# Altium PCB VECTOR_routed_no_sc.PcbDoc (part 1 of 3)
Units mil, origin at the board's own origin, x right, y up, seen from the top; angles counter-clockwise.
Board outline 6000 x 4000 mil, 8 copper layers (Top Layer, Signal Layer 1, Signal Layer 2, Signal Layer 3, Signal Layer 4, VCC, Ground, Bottom Layer), stack 66.302 mil thick; 115 components, 252 nets, 1062 pads, 531 vias.
Unrouted connection lines stored in the file: 3.
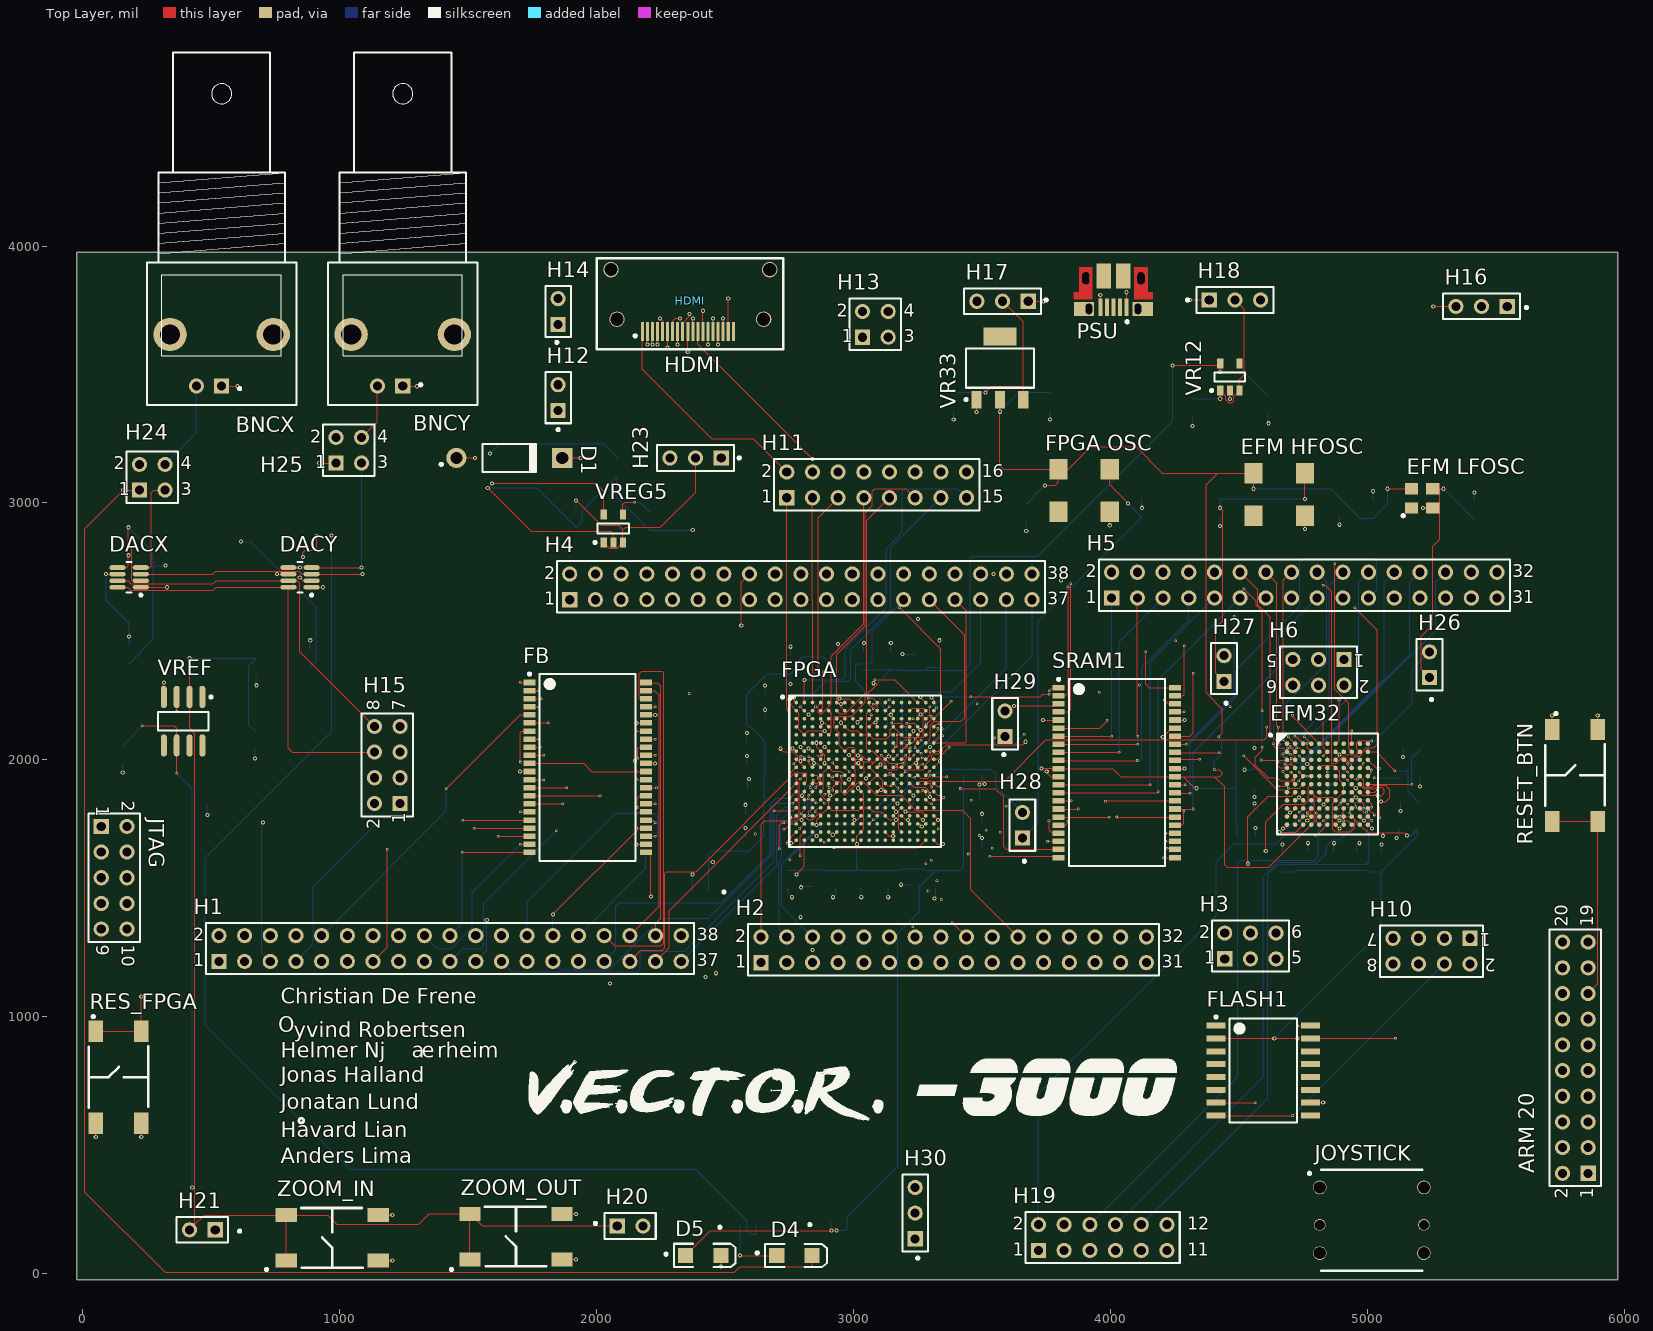
[diagram p0: Top Layer view]
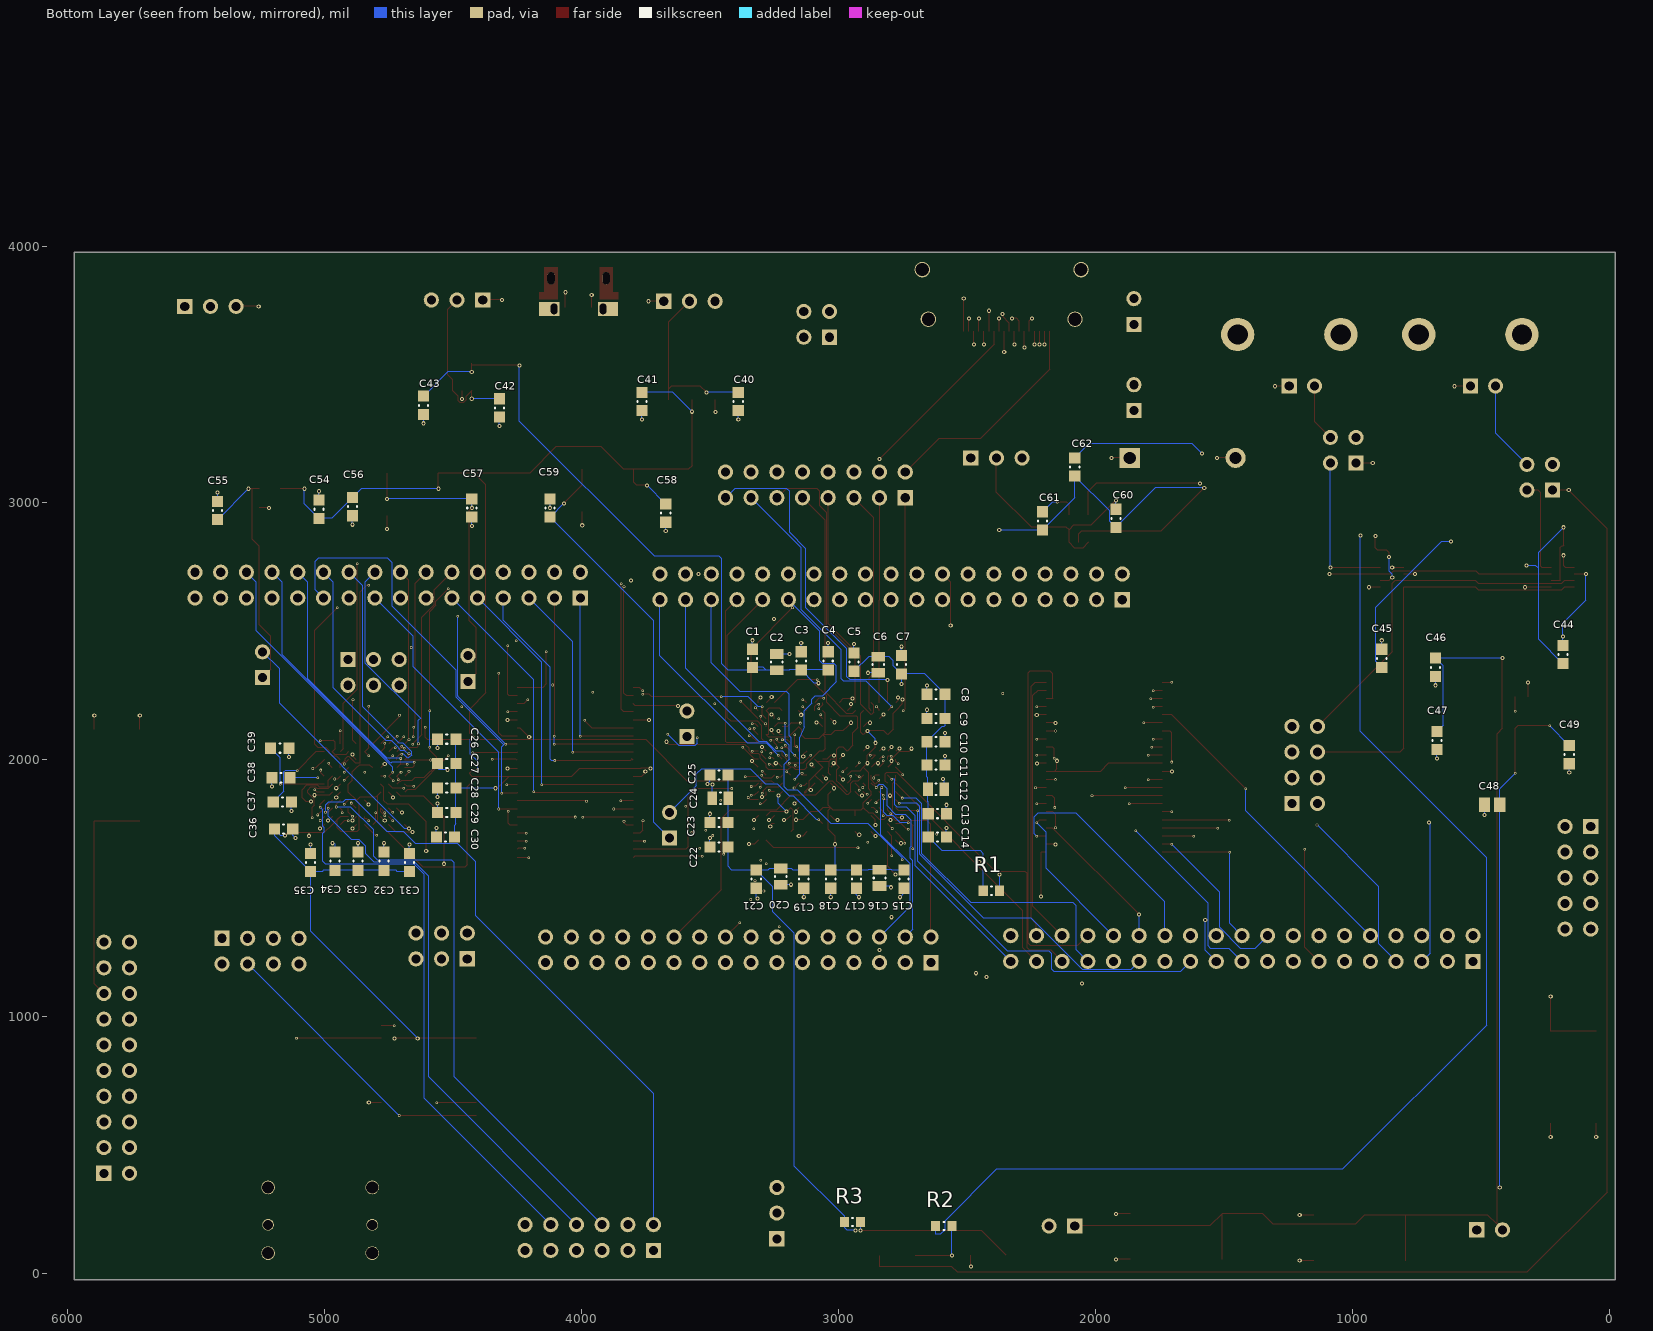
[diagram p1: Bottom Layer view, seen from below]
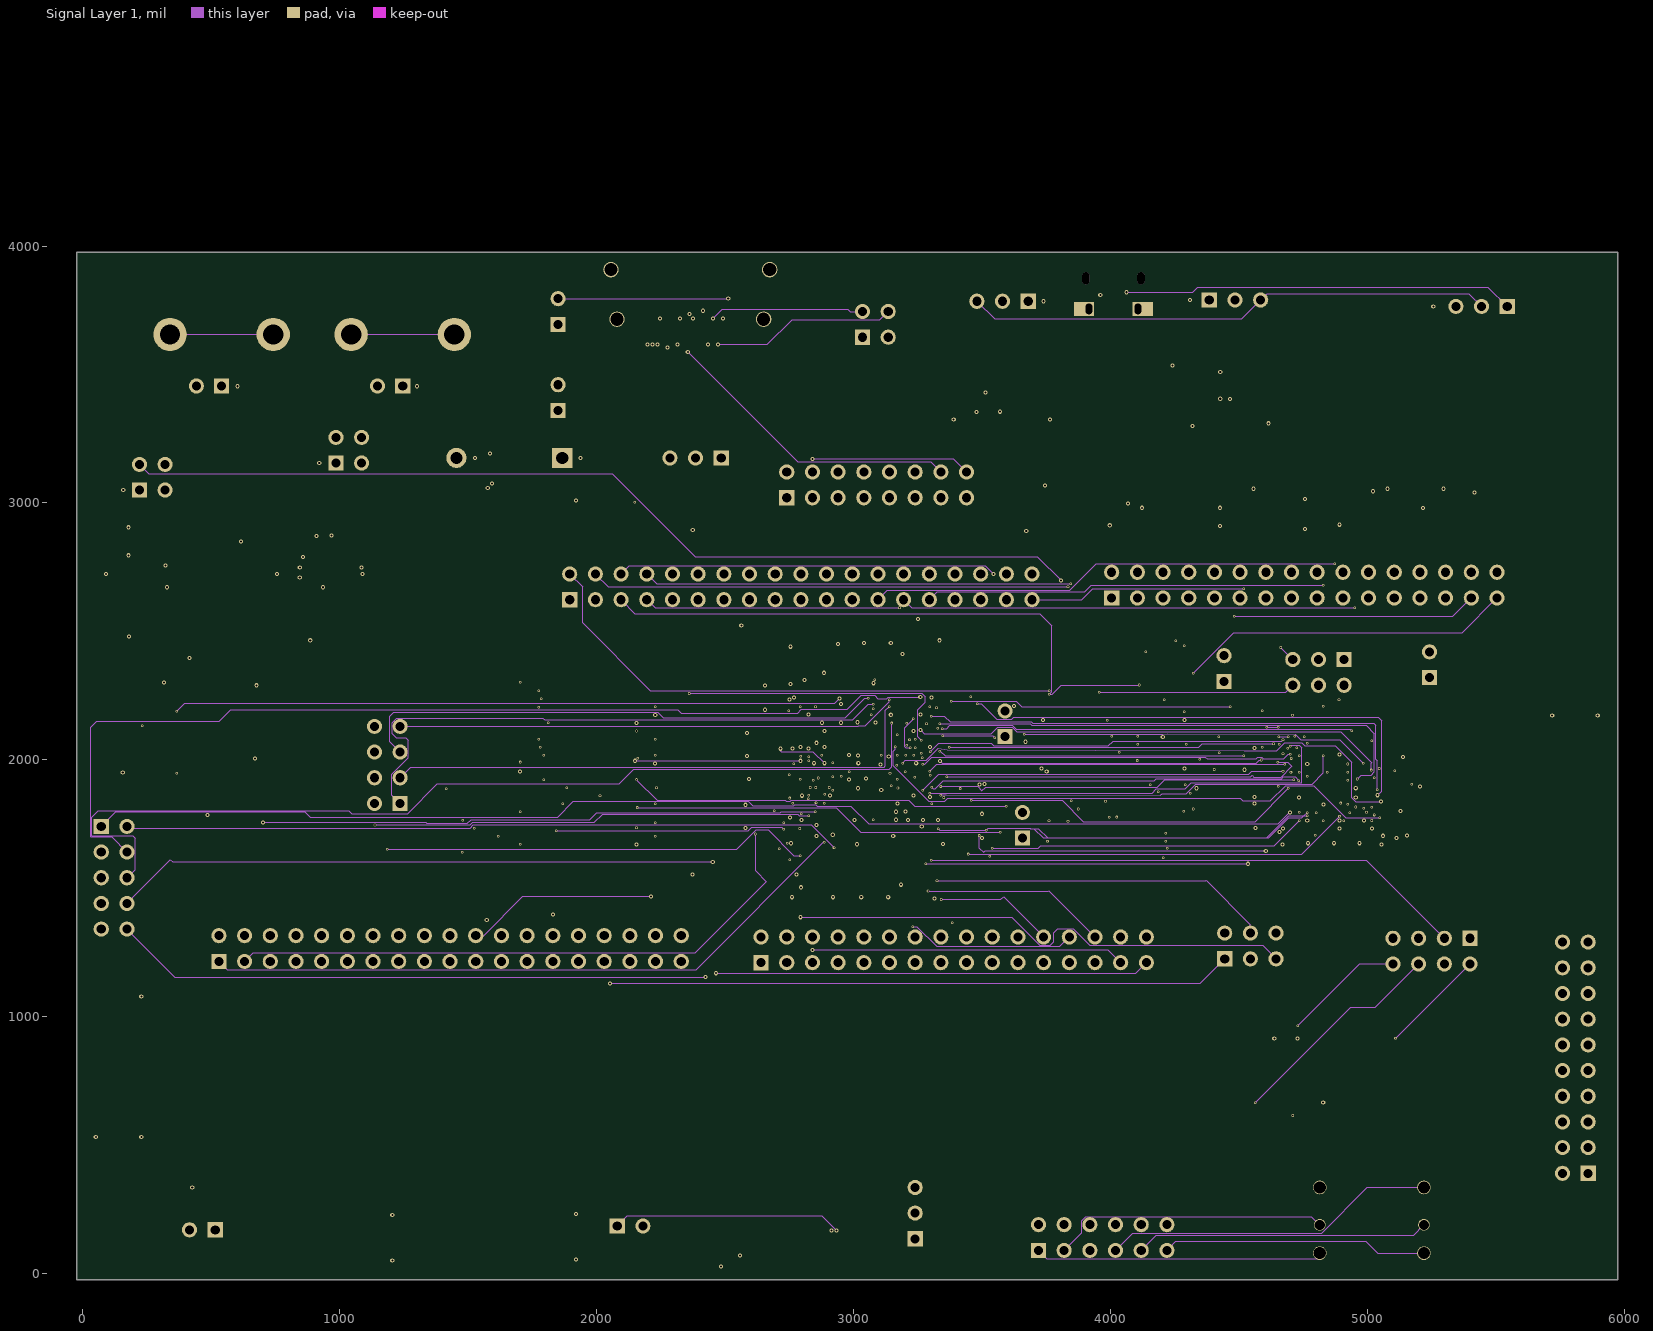
[diagram p2: Signal Layer 1]
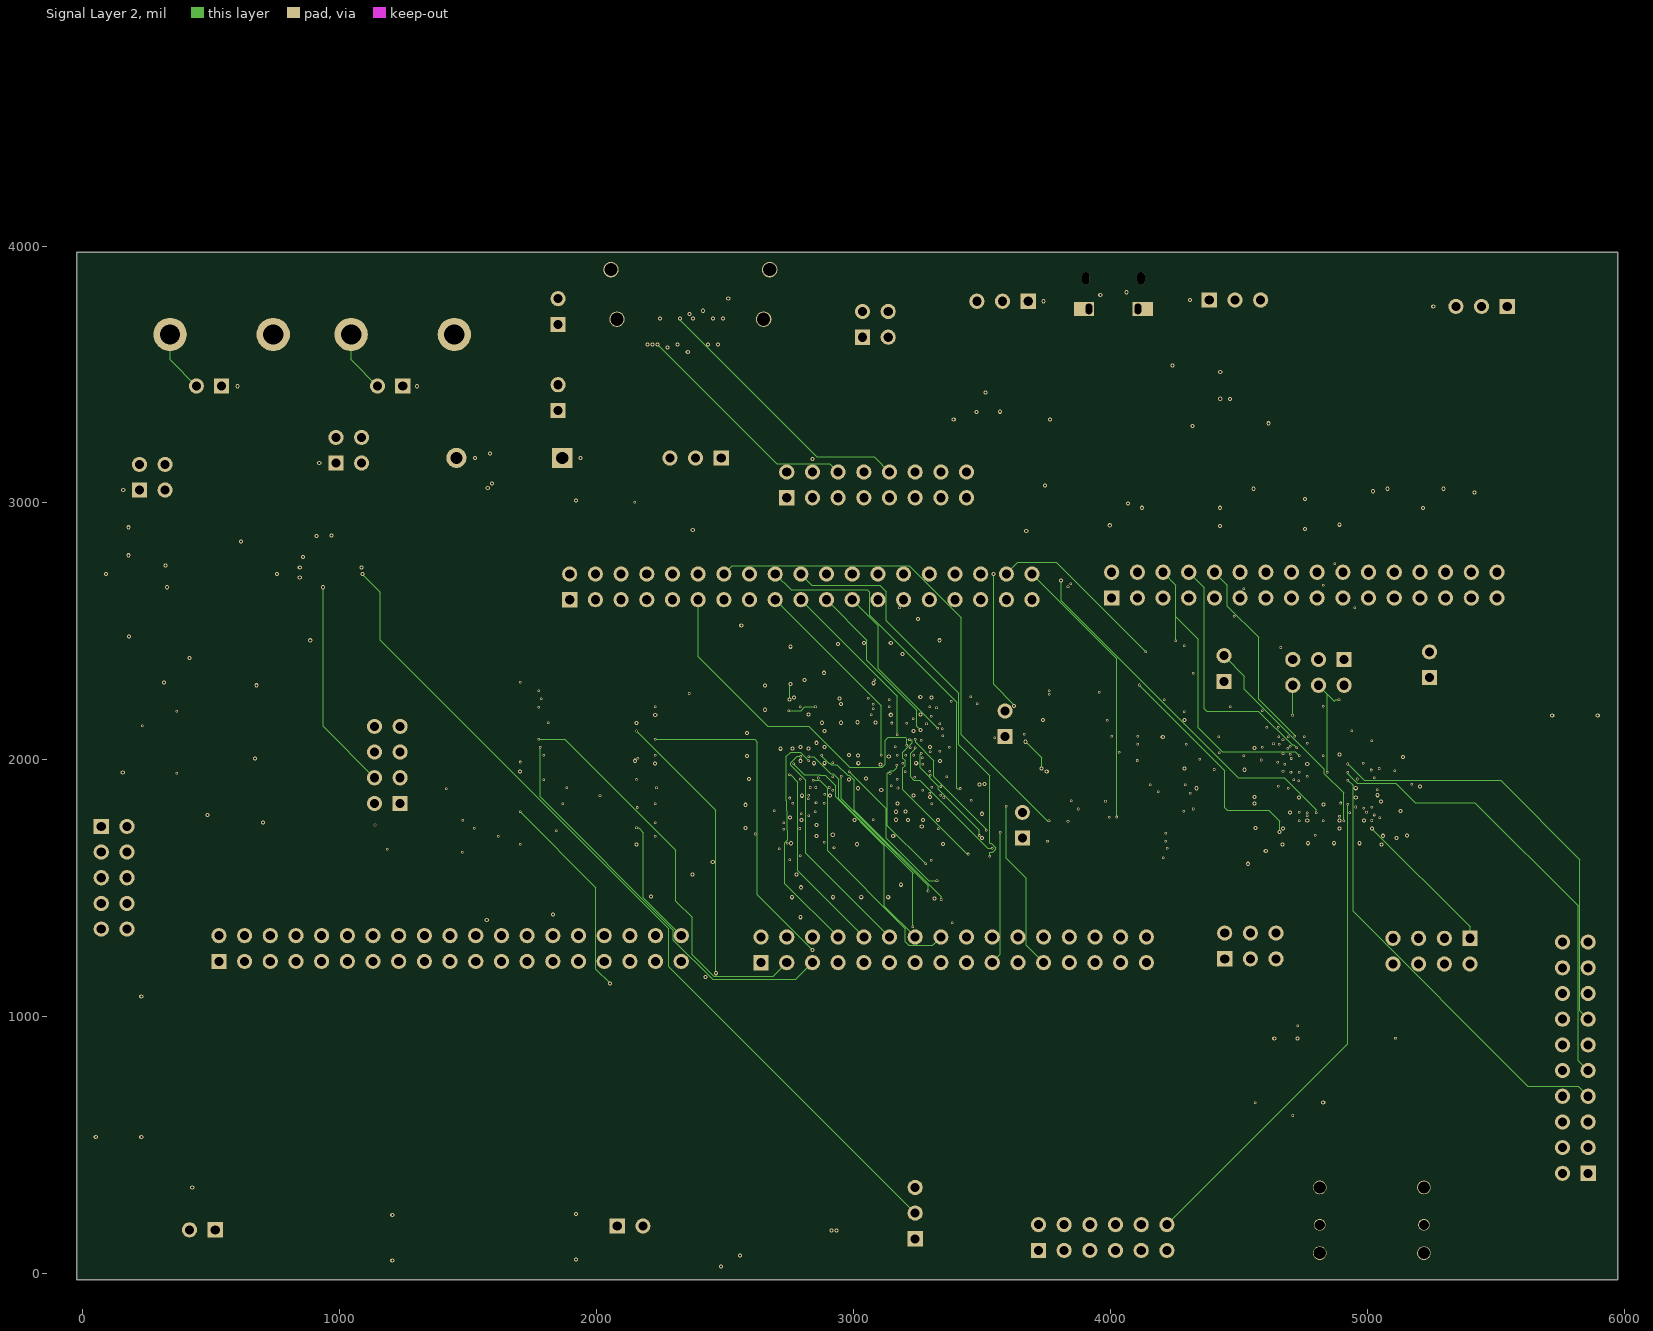
[diagram p3: Signal Layer 2]
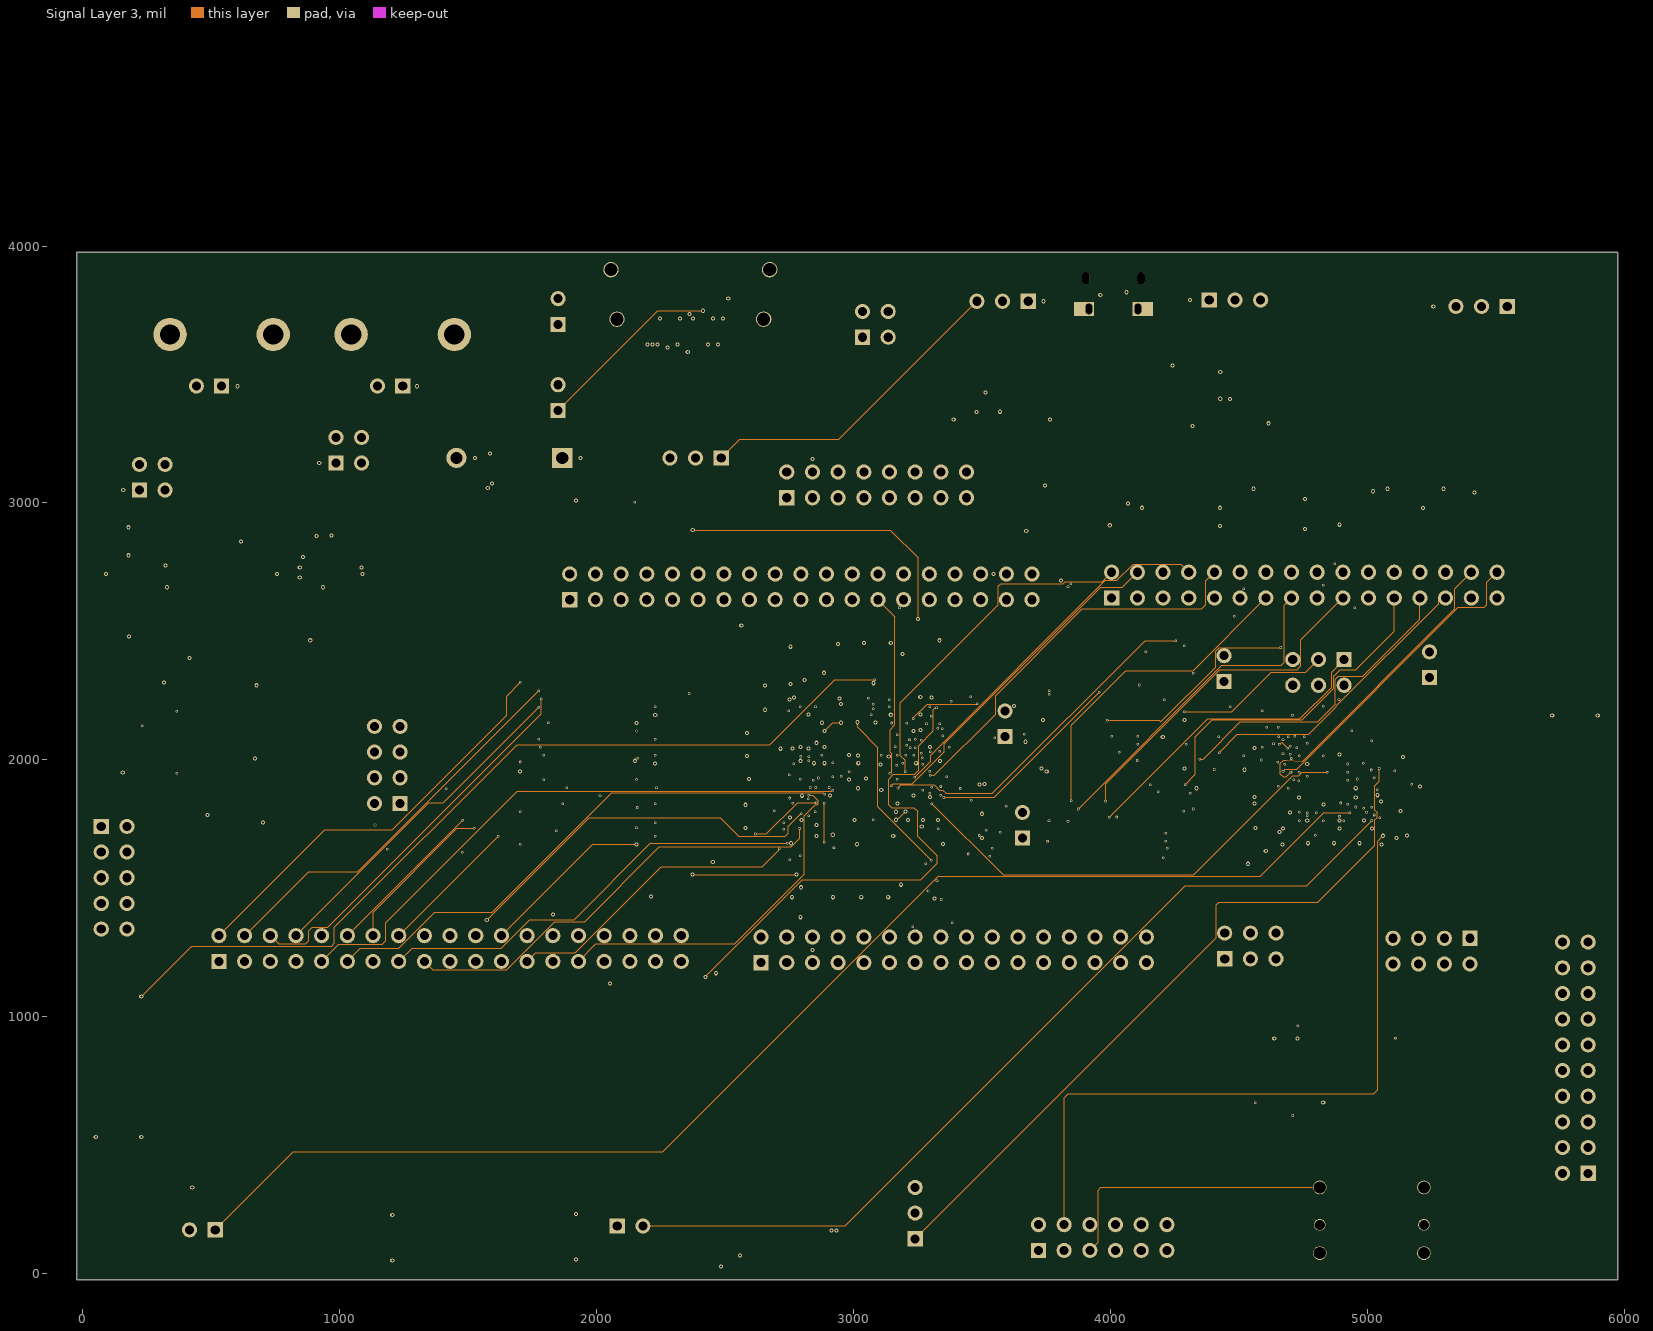
[diagram p4: Signal Layer 3]
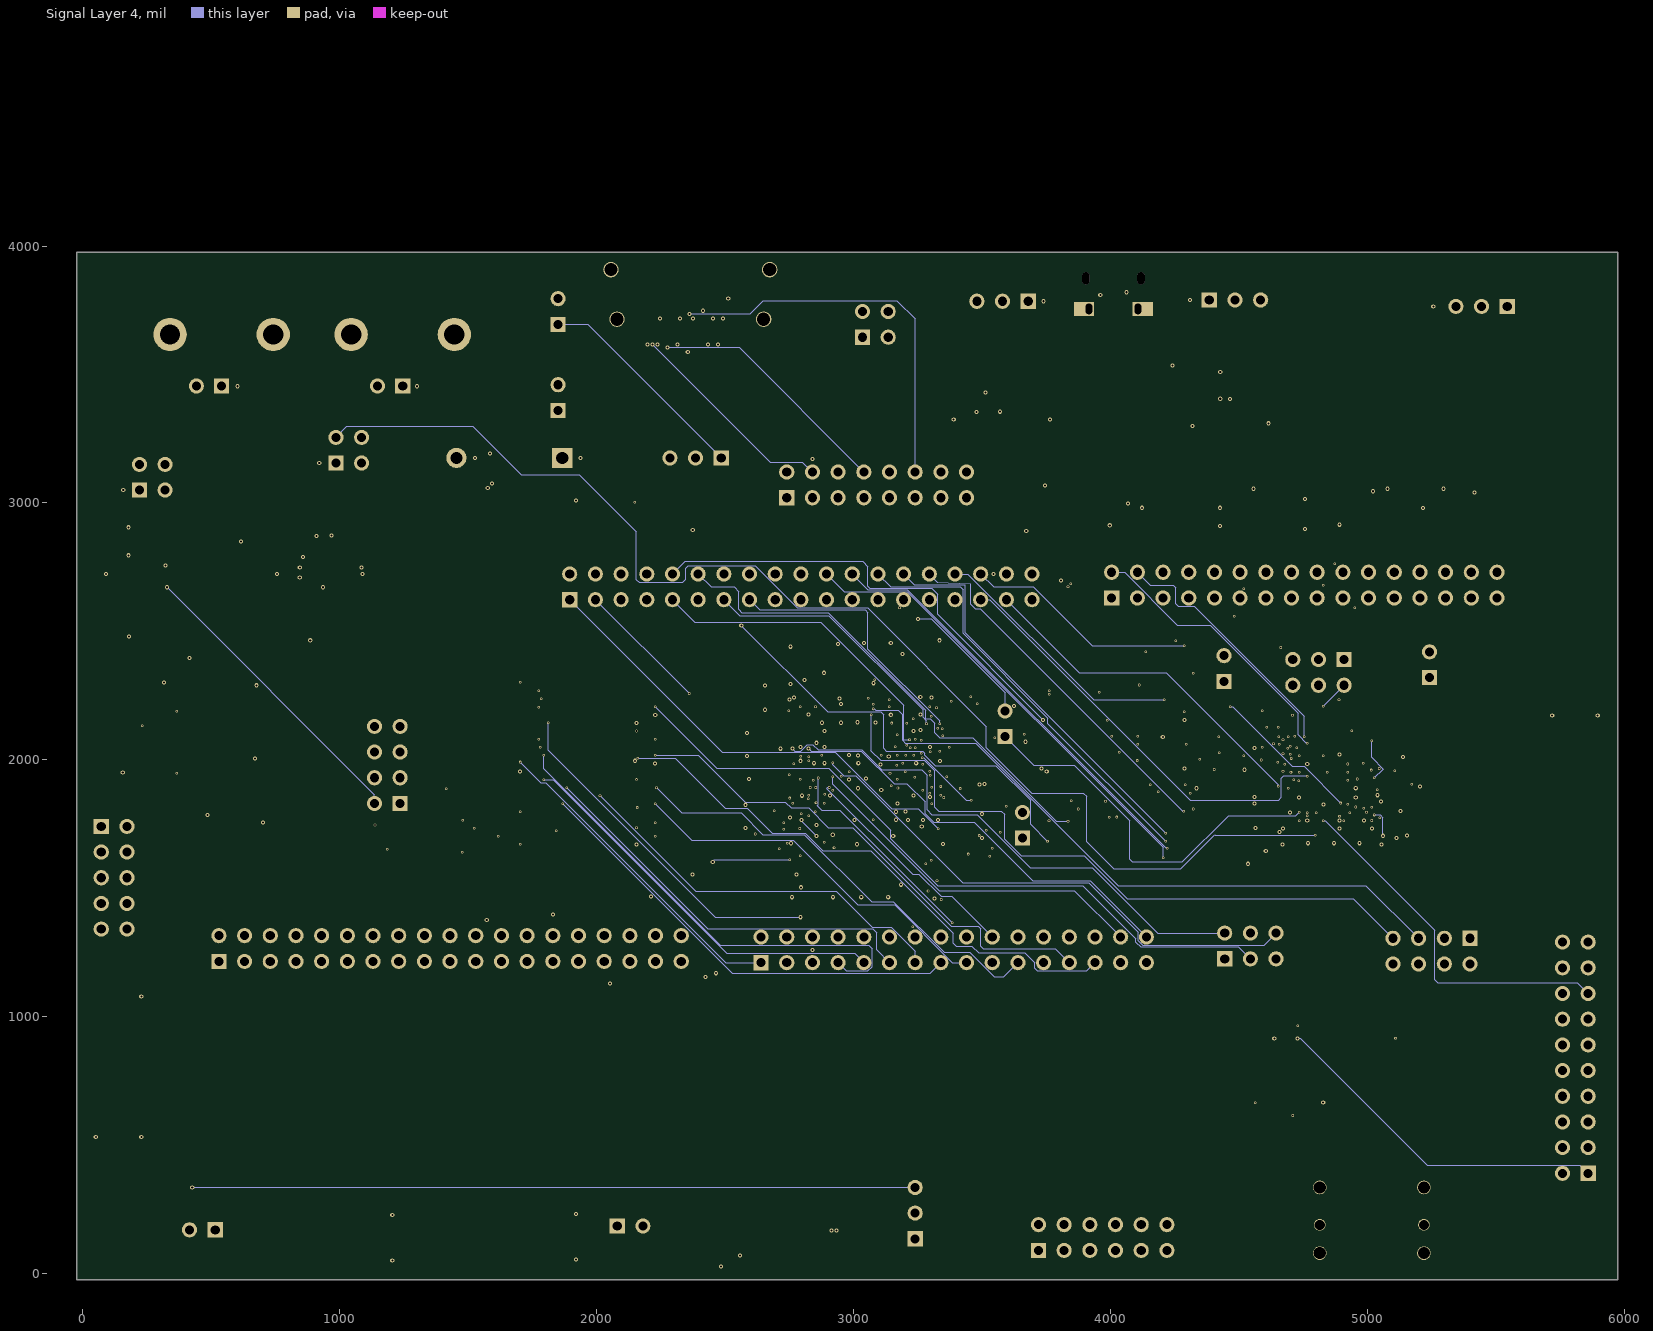
[diagram p5: Signal Layer 4]
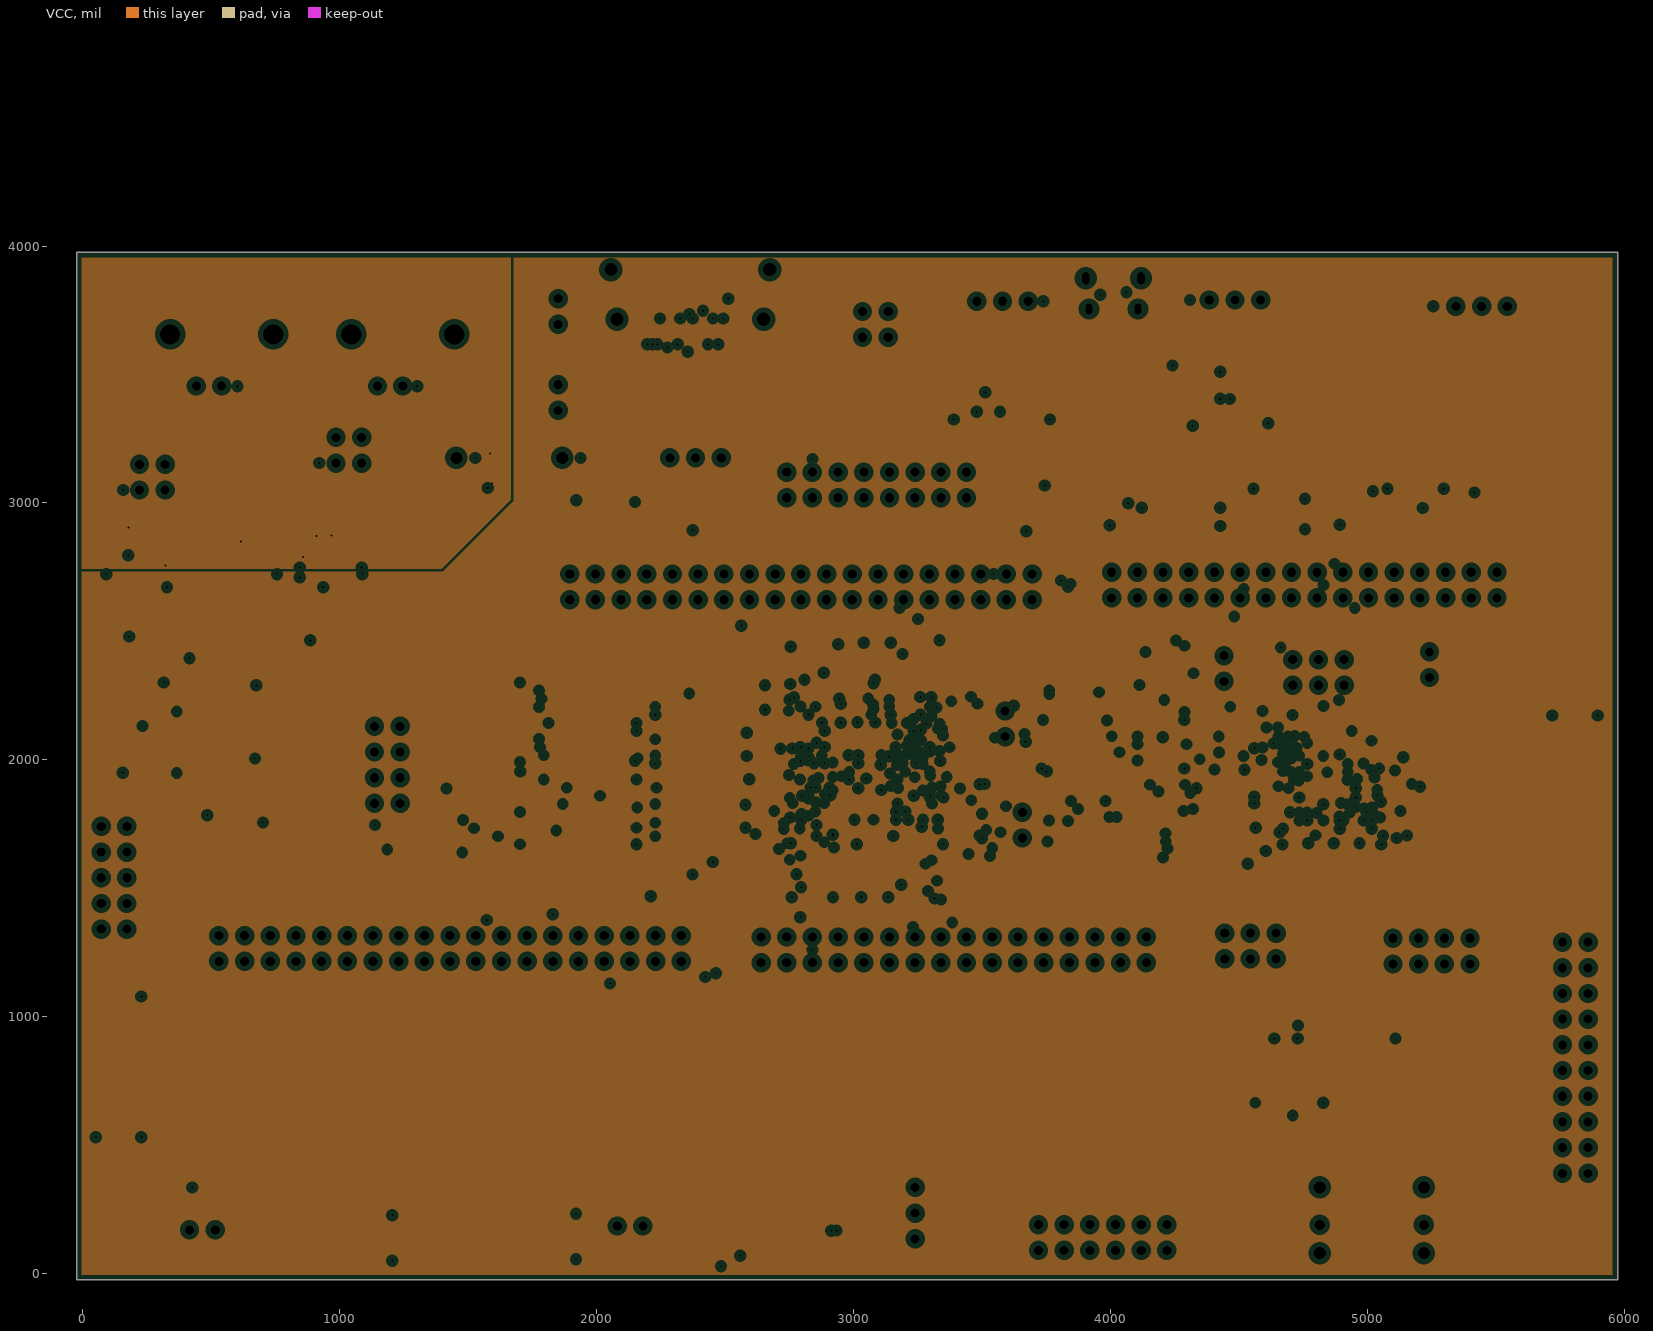
[diagram p6: VCC, clearances drawn from the general rule]
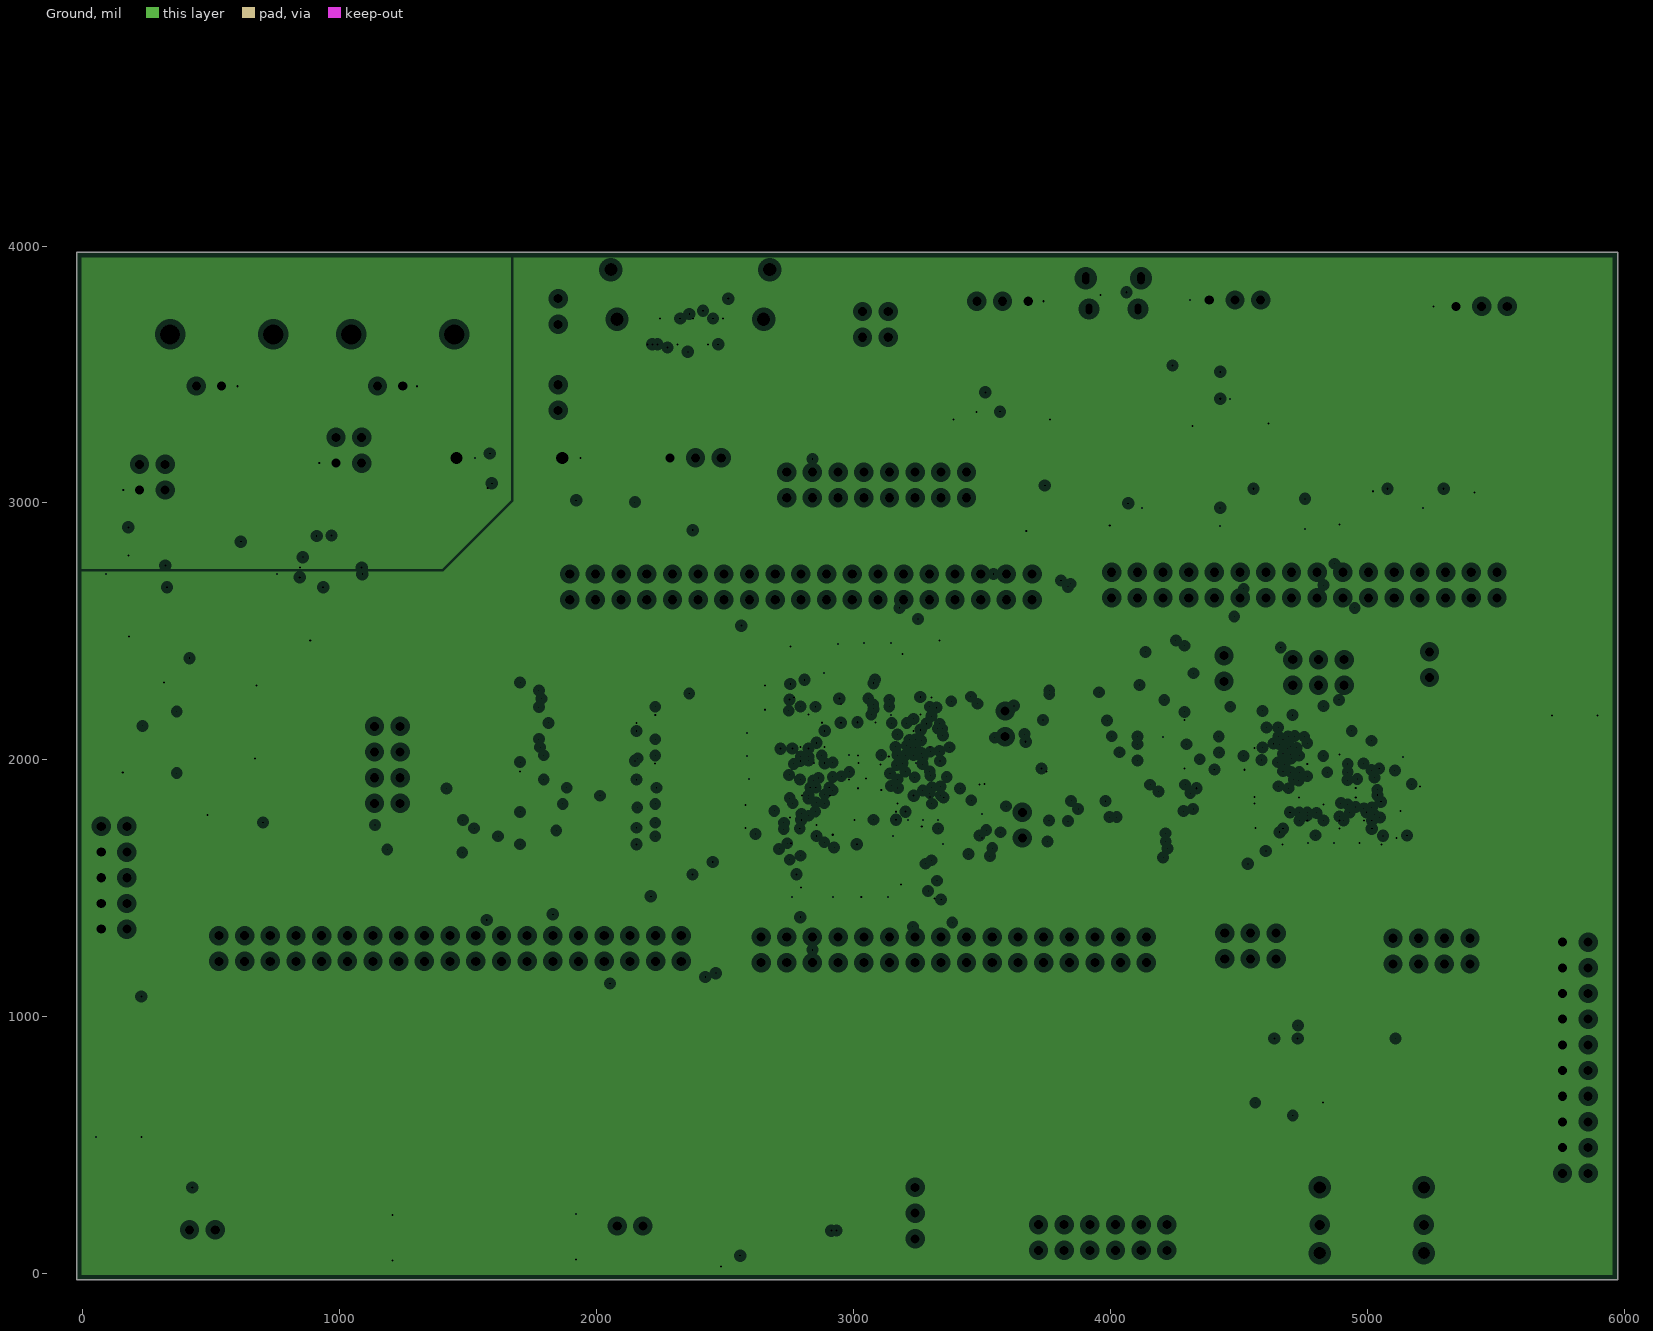
[diagram p7: Ground, clearances drawn from the general rule]

## Layer stack, top to bottom
Top Solder: solder mask 0.4, Solder Resist, Dk 3.5
Top Layer: signal copper 1.4
Dielectric 1: core 10, FR-4, Dk 4.2
Signal Layer 1: signal copper 1.417
Dielectric 5: prepreg 5, Dk 4.2
Signal Layer 2: signal copper 1.417
Dielectric 4: core 10, Dk 4.2
Signal Layer 3: signal copper 1.417
Dielectric 7: prepreg 5, Dk 4.2
Signal Layer 4: signal copper 1.417
Dielectric 8: core 10, Dk 4.2
VCC: plane copper 1.417
Dielectric 3: prepreg 5, Dk 4.2
Ground: plane copper 1.417, net (Multiple Nets)
Dielectric 2: core 10, Dk 4.2
Bottom Layer: signal copper 1.4
Bottom Solder: solder mask 0.4, Solder Resist, Dk 3.5

## Board outline
-25,-25 5975,-25 5975,3975 2980,3975 -25,3975

## Design rules (kind name [scope] priority, off if disabled: settings)
Clearance Clearance_HDMI [InNetClass('HDMI') vs InNetClass('HDMI')] p1: gap=10
Clearance [InNetClass('Not_HDMI') vs InNetClass('Not_HDMI')] p2: gap=3.94
MinimumAnnularRing [All] p1: minimumring=8
MinimumSolderMaskSliver [All] p1: minsoldermaskwidth=3.94
PlaneClearance [All] p1: clearance=20
PlaneConnect [All] p1: planeconnectstyle=Relief reliefexpansion=20 reliefentries=4 reliefconductorwidth=10 reliefairgap=10
PolygonConnect [All] p1: connectstyle=Relief reliefconductorwidth=10 reliefentries=4 polygonreliefangle="90 Angle" airgapwidth=10
RoutingVias [All] p1: holewidth=8 width=16 viastyle="Through Hole" minholewidth=8 minwidth=16 maxholewidth=8 maxwidth=16
SolderMaskExpansion [All] p1: expansion=5
Width Width_Power [InNetClass('Power')] p1: maxlimit=8 minlimit=8 preferedwidth=8
Width [All] p2: maxlimit=4 minlimit=4 preferedwidth=4
27 further rules are at their usual default settings.

## Classes and differential pairs
net class FB.D[0..15]: FB.D0 FB.D1 FB.D2 FB.D3 FB.D4 FB.D5 FB.D6 FB.D7 FB.D8 FB.D9 FB.D10 FB.D11 FB.D12 FB.D13 FB.D14 FB.D15
net class FB.A[0..18]: FB.A0 FB.A1 FB.A2 FB.A3 FB.A4 FB.A5 FB.A6 FB.A7 FB.A8 FB.A9 FB.A10 FB.A11 FB.A12 FB.A13 FB.A14 FB.A15 FB.A16 FB.A17 FB.A18
net class EBI.D[0..15]: EBI.D0 EBI.D1 EBI.D2 EBI.D3 EBI.D4 EBI.D5 EBI.D6 EBI.D7 EBI.D8 EBI.D9 EBI.D10 EBI.D11 EBI.D12 EBI.D13 EBI.D14 EBI.D15
net class EBI.A[0..22]: EBI.A0 EBI.A1 EBI.A2 EBI.A3 EBI.A4 EBI.A5 EBI.A6 EBI.A7 EBI.A8 EBI.A9 EBI.A10 EBI.A11 EBI.A12 EBI.A13 EBI.A14 EBI.A15 EBI.A16 EBI.A17 EBI.A18 EBI.A19 EBI.A20 EBI.A21 EBI.A22
component class Clocks: C54 C55 C56 C57 C58 C59 "EFM HFOSC" "EFM LFOSC" "FPGA OSC" H26 H27 H28
component class DAC: BNCX BNCY C44 C45 C46 C47 C48 C49 D1 DACX DACY H15 H24 H25 H30 VREF
component class "EFM Power": C26 C27 C28 C29 C30 C31 C32 C33 C34 C35 C36 C37 C38
component class EFM: "ARM 20" C39 EFM32 H29 RESET_BTN
component class Flash: FLASH1 H10
component class FPGA_VCC: C1 C2 C3 C4 C5 C6 C7 C8 C9 C10 C11 C12 C13 C14 C15 C16 C17 C18 C19 C20 C21 C22 C23 C24 C25
component class "FPGA Bank 0": FPGA RES_FPGA
component class "FPGA Config": JTAG R1
component class "Frame Buffer": FB H1 H2 H3
component class HDMI: H11 H12 H13 H14 HDMI
component class JoystickButtons: H19 H20 H21 JOYSTICK ZOOM_IN ZOOM_OUT
component class "Power Supply": C40 C41 C42 C43 C60 C61 C62 D4 D5 H16 H17 H18 H23 PSU R2 R3 VR12 VR33 VREG5
component class SRAM: H4 H5 H6 SRAM1

## Components (designator, comment, footprint, x,y, rotation, side; value= is the part's Value field where it differs from the comment)
"ARM 20" "ARM 20 Pin Header" HDR2X10 5860,390 r90 top
BNCX "BNC" "BNC_RA CON" 540,3455 r270 top
BNCY "BNC" "BNC_RA CON" 1245,3455 r270 top
C1 "4.7uF" CAPC0603(1608)100_M 3335,2395 r270 bottom
C2 "100uF" CAPC0805(2012)75_L 3240,2380 r270 bottom
C3 "470nF" CAPC0603(1608)100_M 3145,2385 r270 bottom
C4 "470nF" CAPC0603(1608)100_M 3040,2385 r270 bottom
C5 "4.7uF" CAPC0603(1608)100_M 2940,2380 r270 bottom
C6 "100uF" CAPC0805(2012)75_L 2845,2370 r90 bottom
C7 "470nF" CAPC0603(1608)100_M 2755,2370 r270 bottom
C8 "470nF" CAPC0603(1608)100_M 2620,2255 r180 bottom
C9 "470nF" CAPC0603(1608)100_M 2620,2160 r180 bottom
C10 "470nF" CAPC0603(1608)100_M 2620,2070 r0 bottom
C11 "470nF" CAPC0603(1608)100_M 2620,1980 r0 bottom
C12 "100uF" CAPC0805(2012)75_L 2620,1885 r0 bottom
C13 "4.7uF" CAPC0603(1608)100_M 2615,1790 r0 bottom
C14 "470nF" CAPC0603(1608)100_M 2615,1700 r0 bottom
C15 "470nF" CAPC0603(1608)100_M 2745,1535 r90 bottom
C16 "100uF" CAPC0805(2012)75_L 2840,1540 r90 bottom
C17 "4.7uF" CAPC0603(1608)100_M 2930,1535 r90 bottom
C18 "470nF" CAPC0603(1608)100_M 3030,1535 r90 bottom
C19 "470nF" CAPC0603(1608)100_M 3135,1535 r90 bottom
C20 "100uF" CAPC0805(2012)75_L 3225,1545 r90 bottom
C21 "4.7uF" CAPC0603(1608)100_M 3320,1535 r90 bottom
C22 "470nF" CAPC0603(1608)100_M 3465,1660 r180 bottom
C23 "470nF" CAPC0603(1608)100_M 3465,1755 r180 bottom
C24 "100uF" CAPC0805(2012)75_L 3460,1850 r180 bottom
C25 "4.7uF" CAPC0603(1608)100_M 3465,1940 r180 bottom
C26 "100nF" CAPC0603(1608)100_M 4525,2080 r180 bottom
C27 "100nF" CAPC0603(1608)100_M 4525,1985 r180 bottom
C28 "100nF" CAPC0603(1608)100_M 4525,1890 r180 bottom
C29 "100nF" CAPC0603(1608)100_M 4525,1795 r180 bottom
C30 "100nF" CAPC0603(1608)100_M 4530,1700 r180 bottom
C31 "100nF" CAPC0603(1608)100_M 4670,1600 r270 bottom
C32 "100nF" CAPC0603(1608)100_M 4770,1605 r90 bottom
C33 "10uF" CAPC0603(1608)100_M 4870,1605 r90 bottom
C34 "100nF" CAPC0603(1608)100_M 4960,1605 r90 bottom
C35 "100nF" CAPC0603(1608)100_M 5055,1600 r90 bottom
C36 "100nF" CAPC0603(1608)100_M 5160,1730 r180 bottom
C37 "1uF" CAPC0603(1608)100_M 5165,1835 r180 bottom
C38 "4.7uF" CAPC0603(1608)100_M 5170,1930 r180 bottom
C39 "1uF" CAPC0603(1608)100_M 5175,2045 r180 bottom
C40 "1uF" CAPC0603(1608)100_M 3390,3395 r90 bottom
C41 "1uF" CAPC0603(1608)100_M 3765,3395 r90 bottom
C42 "1uF" CAPC0603(1608)100_M 4320,3370 r90 bottom
C43 "1uF" CAPC0603(1608)100_M 4615,3380 r90 bottom
C44 "1uF" CAPC0603(1608)100_M 180,2410 r90 bottom
C45 "1uF" CAPC0603(1608)100_M 885,2395 r90 bottom
C46 "10uF" CAPC0603(1608)100_M 675,2360 r90 bottom
C47 "100nF" CAPC0603(1608)100_M 670,2075 r90 bottom
C48 "1uF" C0805 455,1825 r0 bottom
C49 "100nF" CAPC0603(1608)100_M 155,2020 r90 bottom
C54 "10nF" CAPC0603(1608)100_M 5022.42,2975.16 r270 bottom
C55 "15pF" CAPC0603(1608)100_M 5417.42,2970.16 r270 bottom
C56 "10nF" CAPC0603(1608)100_M 4892.42,2985.16 r90 bottom
C57 "15pF" CAPC0603(1608)100_M 4427.42,2980.16 r90 bottom
C58 "10nF" CAPC0603(1608)100_M 3672.42,2960.16 r90 bottom
C59 "15pF" CAPC0603(1608)100_M 4122.42,2980.16 r270 bottom
C60 "1uF" CAPC0603(1608)100_M 1920,2940 r90 bottom
C61 "4.7uF" CAPC0603(1608)100_M 2205,2930 r90 bottom
C62 "4.7uF" CAPC0603(1608)100_M 2080,3140 r90 bottom
D1 "Diode 1N4001" DO-41 1660,3175 r0 top
D4 "LED2" 3.2X1.6X1.1 2769.88,69.68 r0 top
D5 "LED2" 3.2X1.6X1.1 2415.16,70.47 r0 top
DACX "AD5061BRJZ-1500RL7" RJ-8_N 180,2710 r180 top
DACY "AD5061BRJZ-1500RL7" RJ-8_N 845,2710 r180 top
EFM32 "EFM32GG990F1024-BGA112" ENMR-BGA112 4845,1905 r0 top
"EFM HFOSC" "FXO-HC736R-48" FPGA-OSC 4522.42,2910.16 r90 top
"EFM LFOSC" "F32K-327" LFOSC-32 5172.42,2980.16 r90 top
FB "CY7C1051DV33-10ZSXI" TSOP-44-SRAM 1965,1970 r0 top
FLASH1 "S25FL129P0XMFI001" SOIC-16-FLASH 4595,790 r0 top
FPGA "XC6SLX45-2CSG324I" CSG324 3045,1955 r0 top
"FPGA OSC" "FXO-HC736R-100" FPGA-OSC 3762.42,2925.16 r90 top
H1 "FB_ADDRESS_HEADER" HDR2X19 529.33,1215.16 r0 top
H2 "FB_DATA_HEADER" HDR2X16 2640,1210 r0 top
H3 "FB_CONTROL_HEADER" HDR2X3 4445,1225 r0 top
H4 "SRAM1_ADDRESS_HEADER" HDR2X19 1895.08,2623.03 r0 top
H5 "SRAM1_DATA_HEADER" HDR2X16 4005,2630 r0 top
H6 "SRAM1_CONTROL_HEADER" HDR2X3 4910,2390 r180 top
H10 "FLASH_HEADER" HDR2X4 5400,1305 r180 top
H11 "HDMI_HEADER" HDR2X8 2740,3020 r0 top
H12 "CEC_HEADER" HDR1X2 1850,3360 r90 top
H13 "DDC_HEADER" HDR2X2 3035,3645 r0 top
H14 "POWER_HEADER" HDR1X2 1850,3695 r90 top
H15 "DAC_HEADER" HDR2X4 1235,1830 r90 top
H16 "5V_HEADER" HDR1X3 5545,3765 r180 top
H17 "3.3V_HEADER" HDR1X3 3680,3785 r180 top
H18 "1.2V_HEADER" HDR1X3 4385,3790 r0 top
H19 "JOYSTICK_HEADER" HDR2X6 3720,90 r0 top
H20 "ZOOM_OUT_HEADER" HDR1X2 2080,185 r0 top
H21 "ZOOM_IN_HEADER" HDR1X2 515,170 r180 top
H23 "5V_DAC_HEADER" HDR1X3 2485,3175 r180 top
H24 "Header 2X2" HDR2X2 220,3050 r0 top
H25 "Header 2X2" HDR2X2 985,3155 r0 top
H26 "Header 2" HDR1X2 5242.42,2320.16 r90 top
H27 "Header 2" HDR1X2 4442.42,2305.16 r90 top
H28 "Header 2" HDR1X2 3657.42,1695.16 r90 top
H29 "Header 2" HDR1X2 3590,2090 r90 top
H30 "Header 3" HDR1X3 3240,135 r90 top
HDMI "HDMI_connector" HDMI-type-A 2650,3715 r180 top
JOYSTICK "SKQUCAA010" 5-WAY-JOYSTICK 4815,335 r0 top
JTAG "Header 5X2" HDR2X5 71.26,1740.55 r270 top
PSU "MICRO-USB_CONNECTOR" MICRO-USB 4011.81,3762.2 r180 top
R1 "4.7kOhm" RESC0603(1608)_N 2405,1490 r0 bottom
R2 "39 Ohm" RESC0603(1608)_N 2590,185 r0 bottom
R3 "18 Ohm" RESC0603(1608)_N 2945,200 r0 bottom
RES_FPGA "FSM2JSMA" Button 50,585 r0 top
RESET_BTN "FSM2JSMA" Button 5720,1760 r0 top
SRAM1 "CY7C1051DV33-10ZSXI" TSOP-44-SRAM 4025,1950 r0 top
VR12 "ADP170AUJZ-1.2-r7" VREG-1.2 4465,3490 r90 top
VR33 "ADP3339AKCZ-3.3-r7" VREG-3.3 3570,3525 r90 top
VREF "REF195GSZ-REEL7" ADI-R-8_N 390,2150 r270 top
VREG5 "LP2992AIM5-5.0/NOPB" VREG-5 2065,2900 r90 top
ZOOM_IN "FSM2JSMA" Button 1150,50 r90 top
ZOOM_OUT "FSM2JSMA" Button 1865,55 r90 top

## Footprints (in the part's own frame and the unit in brackets; to place one, negate y for a bottom-side part, rotate by r counter-clockwise, add the part's x,y. Pads: shape width x height; smd on the part's side, far side on the other; paste and mask are expansions set on the pad)
3.2X1.6X1.1 [mm] "SMT LED; 2 Flat Leads"
  rect 1.5x1.5 smd: 1(-1.75,0) 2(1.75,0)
  silkscreen extent -2.9,-1.15 3.2,1.15
5-WAY-JOYSTICK [mm]
  oval 1.34x1.35 hole 1.2: 1(0,0) 3(0,-6.5) 4(10.3,-6.5) 6(10.3,0)
  round 1.15 hole 1: 2(0,-3.7) 5(10.3,-3.7)
  silkscreen extent 0.15,-8.25 10.15,1.75
ADI-R-8_N [mm] "SOIC, 8-Leads, Body 4.9x3.9mm, Pitch 1.27mm, IPC Medium Density"
  oval 2.2x0.6 smd: 1(-2.4,1.905) 2(-2.4,0.635) 3(-2.4,-0.635) 4(-2.4,-1.905) 5(2.4,-1.905) 6(2.4,-0.635) 7(2.4,0.635) 8(2.4,1.905)
  silkscreen extent -2.52,-2.5 0.9,2.88, body extent -2,-2.5 2,2.5, height 1.75
"BNC_RA CON" [mm] "Connector; BNC Elbow"
  rect 1.5x1.5 hole 0.9: 1(0,0)
  round 3.3 hole 2: 2(-5.1,5.1) 2(-5.1,-5.1)
  round 1.5 hole 0.9: 2(0,-2.5)
  silkscreen extent -33,-7.4 1.9,7.4
Button [mm] "copied from 256 SoG"
  rect 1.4x2.1 smd: 1(0,9.1) 2(0,0) 3(4.5,9.1) 4(4.5,0)
  silkscreen extent -0.7,1.55 5.21,7.62
C0805 [mm] "Chip Capacitor, Body 2.0x1.3mm, IPC High Density"
  rect 1.1x1.4 smd: 1(-0.75,0) 2(0.75,0)
  body extent -1.1,-0.72 1.1,0.72, height 1.4
CAPC0603(1608)100_M [mm] "Chip Capacitor, Body 1.6x0.8mm, Height 1.0mm, IPC Low Density"
  rect 1.1x1.1 smd: 1(-0.9,0) 2(0.9,0)
  silkscreen extent -0.05,-0.45 0.05,0.45, body extent -0.87,-0.47 0.88,0.48, height 1
CAPC0805(2012)75_L [mm] "Chip Capacitor, Body 2.0x1.2mm, Height 0.75mm, IPC High Density"
  rect 0.95x1.35 smd: 1(-0.8,0) 2(0.8,0)
  silkscreen extent -0.05,-0.58 0.05,0.58, body extent -1.1,-0.72 1.1,0.72, height 0.75
CSG324 [mm] "BGA, 324-Leads, Body 15x15mm, Pitch 0.8mm"
  round 0.36 smd: A1(-6.8,6.8) A2(-6,6.8) A3(-5.2,6.8) A4(-4.4,6.8) A5(-3.6,6.8) A6(-2.8,6.8) A7(-2,6.8) A8(-1.2,6.8) A9(-0.4,6.8) A10(0.4,6.8) A11(1.2,6.8) A12(2,6.8) A13(2.8,6.8) A14(3.6,6.8) A15(4.4,6.8) A16(5.2,6.8) A17(6,6.8) A18(6.8,6.8) B1(-6.8,6) B2(-6,6) B3(-5.2,6) B4(-4.4,6) B5(-3.6,6) B6(-2.8,6) B7(-2,6) B8(-1.2,6) B9(-0.4,6) B10(0.4,6) B11(1.2,6) B12(2,6) B13(2.8,6) B14(3.6,6) B15(4.4,6) B16(5.2,6) B17(6,6) B18(6.8,6) C1(-6.8,5.2) C2(-6,5.2) C3(-5.2,5.2) C4(-4.4,5.2) C5(-3.6,5.2) C6(-2.8,5.2) C7(-2,5.2) C8(-1.2,5.2) C9(-0.4,5.2) C10(0.4,5.2) C11(1.2,5.2) C12(2,5.2) C13(2.8,5.2) C14(3.6,5.2) C15(4.4,5.2) C16(5.2,5.2) C17(6,5.2) C18(6.8,5.2) D1(-6.8,4.4) D2(-6,4.4) D3(-5.2,4.4) D4(-4.4,4.4) D5(-3.6,4.4) D6(-2.8,4.4) D7(-2,4.4) D8(-1.2,4.4) D9(-0.4,4.4) D10(0.4,4.4) D11(1.2,4.4) D12(2,4.4) D13(2.8,4.4) D14(3.6,4.4) D15(4.4,4.4) D16(5.2,4.4) D17(6,4.4) D18(6.8,4.4) E1(-6.8,3.6) E2(-6,3.6) E3(-5.2,3.6) E4(-4.4,3.6) E5(-3.6,3.6) E6(-2.8,3.6) E7(-2,3.6) E8(-1.2,3.6) E9(-0.4,3.6) E10(0.4,3.6) E11(1.2,3.6) E12(2,3.6) E13(2.8,3.6) E14(3.6,3.6) E15(4.4,3.6) E16(5.2,3.6) E17(6,3.6) E18(6.8,3.6) F1(-6.8,2.8) F2(-6,2.8) F3(-5.2,2.8) F4(-4.4,2.8) F5(-3.6,2.8) F6(-2.8,2.8) F7(-2,2.8) F8(-1.2,2.8) F9(-0.4,2.8) F10(0.4,2.8) F11(1.2,2.8) F12(2,2.8) F13(2.8,2.8) F14(3.6,2.8) F15(4.4,2.8) F16(5.2,2.8) F17(6,2.8) F18(6.8,2.8) G1(-6.8,2) G2(-6,2) G3(-5.2,2) G4(-4.4,2) G5(-3.6,2) G6(-2.8,2) G7(-2,2) G8(-1.2,2) G9(-0.4,2) G10(0.4,2) G11(1.2,2) G12(2,2) G13(2.8,2) G14(3.6,2) G15(4.4,2) G16(5.2,2) G17(6,2) G18(6.8,2) H1(-6.8,1.2) H2(-6,1.2) H3(-5.2,1.2) H4(-4.4,1.2) H5(-3.6,1.2) H6(-2.8,1.2) H7(-2,1.2) H8(-1.2,1.2) H9(-0.4,1.2) H10(0.4,1.2) H11(1.2,1.2) H12(2,1.2) H13(2.8,1.2) H14(3.6,1.2) H15(4.4,1.2) H16(5.2,1.2) H17(6,1.2) H18(6.8,1.2) J1(-6.8,0.4) J2(-6,0.4) J3(-5.2,0.4) J4(-4.4,0.4) J5(-3.6,0.4) J6(-2.8,0.4) J7(-2,0.4) J8(-1.2,0.4) J9(-0.4,0.4) J10(0.4,0.4) J11(1.2,0.4) J12(2,0.4) J13(2.8,0.4) J14(3.6,0.4) J15(4.4,0.4) J16(5.2,0.4) J17(6,0.4) J18(6.8,0.4) K1(-6.8,-0.4) K2(-6,-0.4) K3(-5.2,-0.4) K4(-4.4,-0.4) K5(-3.6,-0.4) K6(-2.8,-0.4) K7(-2,-0.4) K8(-1.2,-0.4) K9(-0.4,-0.4) K10(0.4,-0.4) K11(1.2,-0.4) K12(2,-0.4) K13(2.8,-0.4) K14(3.6,-0.4) K15(4.4,-0.4) K16(5.2,-0.4) K17(6,-0.4) K18(6.8,-0.4) L1(-6.8,-1.2) L2(-6,-1.2) L3(-5.2,-1.2) L4(-4.4,-1.2) L5(-3.6,-1.2) L6(-2.8,-1.2) L7(-2,-1.2) L8(-1.2,-1.2) L9(-0.4,-1.2) L10(0.4,-1.2) L11(1.2,-1.2) L12(2,-1.2) L13(2.8,-1.2) L14(3.6,-1.2) L15(4.4,-1.2) L16(5.2,-1.2) L17(6,-1.2) L18(6.8,-1.2) M1(-6.8,-2) M2(-6,-2) M3(-5.2,-2) M4(-4.4,-2) M5(-3.6,-2) M6(-2.8,-2) M7(-2,-2) M8(-1.2,-2) M9(-0.4,-2) M10(0.4,-2) M11(1.2,-2) M12(2,-2) M13(2.8,-2) M14(3.6,-2) M15(4.4,-2) M16(5.2,-2) M17(6,-2) M18(6.8,-2) N1(-6.8,-2.8) N2(-6,-2.8) N3(-5.2,-2.8) N4(-4.4,-2.8) N5(-3.6,-2.8) N6(-2.8,-2.8) N7(-2,-2.8) N8(-1.2,-2.8) N9(-0.4,-2.8) N10(0.4,-2.8) N11(1.2,-2.8) N12(2,-2.8) N13(2.8,-2.8) N14(3.6,-2.8) N15(4.4,-2.8) N16(5.2,-2.8) N17(6,-2.8) N18(6.8,-2.8) P1(-6.8,-3.6) P2(-6,-3.6) P3(-5.2,-3.6) P4(-4.4,-3.6) P5(-3.6,-3.6) P6(-2.8,-3.6) P7(-2,-3.6) P8(-1.2,-3.6) P9(-0.4,-3.6) P10(0.4,-3.6) P11(1.2,-3.6) P12(2,-3.6) P13(2.8,-3.6) P14(3.6,-3.6) P15(4.4,-3.6) P16(5.2,-3.6) P17(6,-3.6) P18(6.8,-3.6) R1(-6.8,-4.4) R2(-6,-4.4) R3(-5.2,-4.4) R4(-4.4,-4.4) R5(-3.6,-4.4) R6(-2.8,-4.4) R7(-2,-4.4) R8(-1.2,-4.4) R9(-0.4,-4.4) R10(0.4,-4.4) R11(1.2,-4.4) R12(2,-4.4) R13(2.8,-4.4) R14(3.6,-4.4) R15(4.4,-4.4) R16(5.2,-4.4) R17(6,-4.4) R18(6.8,-4.4) T1(-6.8,-5.2) T2(-6,-5.2) T3(-5.2,-5.2) T4(-4.4,-5.2) T5(-3.6,-5.2) T6(-2.8,-5.2) T7(-2,-5.2) T8(-1.2,-5.2) T9(-0.4,-5.2) T10(0.4,-5.2) T11(1.2,-5.2) T12(2,-5.2) T13(2.8,-5.2) T14(3.6,-5.2) T15(4.4,-5.2) T16(5.2,-5.2) T17(6,-5.2) T18(6.8,-5.2) U1(-6.8,-6) U2(-6,-6) U3(-5.2,-6) U4(-4.4,-6) U5(-3.6,-6) U6(-2.8,-6) U7(-2,-6) U8(-1.2,-6) U9(-0.4,-6) U10(0.4,-6) U11(1.2,-6) U12(2,-6) U13(2.8,-6) U14(3.6,-6) U15(4.4,-6) U16(5.2,-6) U17(6,-6) U18(6.8,-6) V1(-6.8,-6.8) V2(-6,-6.8) V3(-5.2,-6.8) V4(-4.4,-6.8) V5(-3.6,-6.8) V6(-2.8,-6.8) V7(-2,-6.8) V8(-1.2,-6.8) V9(-0.4,-6.8) V10(0.4,-6.8) V11(1.2,-6.8) V12(2,-6.8) V13(2.8,-6.8) V14(3.6,-6.8) V15(4.4,-6.8) V16(5.2,-6.8) V17(6,-6.8) V18(6.8,-6.8)
  silkscreen extent -8.27,-7.5 7.5,7.5, body extent -7.5,-7.5 7.5,7.5, height 1.5
DO-41 [mm] "Diode, Axial; Body 5.2 x 2.7 mm (LxDia. max), Lead Dia. 0.86 mm (max)"
  round 2 hole 1.2: 1(-5.23,0)
  rect 2x2 hole 1.2: 2(5.23,0)
  silkscreen extent -2.65,-1.4 2.75,1.4
ENMR-BGA112 [mm] "BGA, 112-Balls, Body 10x10mm, Pitch 0.8mm"
  round 0.45 smd: A1(-4,4) A2(-3.2,4) A3(-2.4,4) A4(-1.6,4) A5(-0.8,4) A6(0,4) A7(0.8,4) A8(1.6,4) A9(2.4,4) A10(3.2,4) A11(4,4) B1(-4,3.2) B2(-3.2,3.2) B3(-2.4,3.2) B4(-1.6,3.2) B5(-0.8,3.2) B6(0,3.2) B7(0.8,3.2) B8(1.6,3.2) B9(2.4,3.2) B10(3.2,3.2) B11(4,3.2) C1(-4,2.4) C2(-3.2,2.4) C3(-2.4,2.4) C4(-1.6,2.4) C5(-0.8,2.4) C6(0,2.4) C7(0.8,2.4) C8(1.6,2.4) C9(2.4,2.4) C10(3.2,2.4) C11(4,2.4) D1(-4,1.6) D2(-3.2,1.6) D3(-2.4,1.6) D4(-1.6,1.6) D5(-0.8,1.6) D6(0,1.6) D7(0.8,1.6) D8(1.6,1.6) D9(2.4,1.6) D10(3.2,1.6) D11(4,1.6) E1(-4,0.8) E2(-3.2,0.8) E3(-2.4,0.8) E4(-1.6,0.8) E5(-0.8,0.8) E6(0,0.8) E7(0.8,0.8) E8(1.6,0.8) E9(2.4,0.8) E10(3.2,0.8) E11(4,0.8) F1(-4,0) F2(-3.2,0) F3(-2.4,0) F4(-1.6,0) F5(-0.8,0) F6(0,0) F7(0.8,0) F8(1.6,0) F9(2.4,0) F10(3.2,0) F11(4,0) G1(-4,-0.8) G2(-3.2,-0.8) G3(-2.4,-0.8) G4(-1.6,-0.8) G5(-0.8,-0.8) G6(0,-0.8) G7(0.8,-0.8) G8(1.6,-0.8) G9(2.4,-0.8) G10(3.2,-0.8) G11(4,-0.8) H1(-4,-1.6) H2(-3.2,-1.6) H3(-2.4,-1.6) H4(-1.6,-1.6) H5(-0.8,-1.6) H6(0,-1.6) H7(0.8,-1.6) H8(1.6,-1.6) H9(2.4,-1.6) H10(3.2,-1.6) H11(4,-1.6) J1(-4,-2.4) J2(-3.2,-2.4) J3(-2.4,-2.4) J4(-1.6,-2.4) J5(-0.8,-2.4) J6(0,-2.4) J7(0.8,-2.4) J8(1.6,-2.4) J9(2.4,-2.4) J10(3.2,-2.4) J11(4,-2.4) K1(-4,-3.2) K2(-3.2,-3.2) K3(-2.4,-3.2) K4(-1.6,-3.2) K5(-0.8,-3.2) K6(0,-3.2) K7(0.8,-3.2) K8(1.6,-3.2) K9(2.4,-3.2) K10(3.2,-3.2) K11(4,-3.2) L1(-4,-4) L2(-3.2,-4) L3(-2.4,-4) L4(-1.6,-4) L5(-0.8,-4) L6(0,-4) L7(0.8,-4) L8(1.6,-4) L9(2.4,-4) L10(3.2,-4) L11(4,-4)
  silkscreen extent -5.77,-5 5,5, body extent -5,-5 5,5, height 1.3
FPGA-OSC [mm]
  rect 2x1.8 smd: 1(1.016,-0.889) 2(1.016,-5.969) 3(5.216,-5.969) 4(5.216,-0.889)
  round 0.3 on Top Overlay: 3(-0.381,0.508)
HDMI-type-A [mm]
  rect 0.3x1.9 smd: 1(12,1.2) 2(11.5,1.2) 3(11,1.2) 4(10.5,1.2) 5(10,1.2) 6(9.5,1.2) 7(9,1.2) 8(8.5,1.2) 9(8,1.2) 10(7.5,1.2) 11(7,1.2) 12(6.5,1.2) 13(6,1.2) 14(5.5,1.2) 15(5,1.2) 16(4.5,1.2) 17(4,1.2) 18(3.5,1.2) 19(3,1.2)
  round 1.524 hole 1.3: ""(-0.6,-4.9) ""(0,0) ""(14.5,0) ""(15.1,-4.9)
  silkscreen extent -1.95,-6.01 16.52,2.97
HDR1X2 [mm] "Connector; Header; 2 Position"
  rect 1.5x1.5 hole 0.9: 1(0,0)
  round 1.5 hole 0.9: 2(2.54,0)
  silkscreen extent -1.27,-1.27 3.81,1.27
HDR1X3 [mm] "Connector; Header; 3 Position"
  rect 1.5x1.5 hole 0.9: 1(0,0)
  round 1.5 hole 0.9: 2(2.54,0) 3(5.08,0)
  silkscreen extent -1.27,-1.27 6.35,1.27
HDR2X2 [mm] "Connector; Header; 2x2 Position"
  rect 1.5x1.5 hole 0.9: 1(0,0)
  round 1.5 hole 0.9: 2(0,2.54) 3(2.54,0) 4(2.54,2.54)
  silkscreen extent -1.27,-1.27 3.81,3.81
HDR2X3 [mm] "Connector; Header; 3x2 Position"
  rect 1.5x1.5 hole 0.9: 1(0,0)
  round 1.5 hole 0.9: 2(0,2.54) 3(2.54,0) 4(2.54,2.54) 5(5.08,0) 6(5.08,2.54)
  silkscreen extent -1.27,-1.27 6.35,3.81
HDR2X4 [mm] "Connector; Header; 4x2 Position"
  rect 1.5x1.5 hole 0.9: 1(0,0)
  round 1.5 hole 0.9: 2(0,2.54) 3(2.54,0) 4(2.54,2.54) 5(5.08,0) 6(5.08,2.54) 7(7.62,0) 8(7.62,2.54)
  silkscreen extent -1.27,-1.27 8.89,3.81
HDR2X5 [mm] "Connector; Header; 5x2 Position"
  rect 1.5x1.5 hole 0.9: 1(0,0)
  round 1.5 hole 0.9: 2(0,2.54) 3(2.54,0) 4(2.54,2.54) 5(5.08,0) 6(5.08,2.54) 7(7.62,0) 8(7.62,2.54) 9(10.16,0) 10(10.16,2.54)
  silkscreen extent -1.27,-1.27 11.43,3.81
HDR2X6 [mm] "Connector; Header; 6x2 Position"
  rect 1.5x1.5 hole 0.9: 1(0,0)
  round 1.5 hole 0.9: 2(0,2.54) 3(2.54,0) 4(2.54,2.54) 5(5.08,0) 6(5.08,2.54) 7(7.62,0) 8(7.62,2.54) 9(10.16,0) 10(10.16,2.54) 11(12.7,0) 12(12.7,2.54)
  silkscreen extent -1.27,-1.27 13.97,3.81
HDR2X8 [mm] "Connector; Header; 8x2 Position"
  rect 1.5x1.5 hole 0.9: 1(0,0)
  round 1.5 hole 0.9: 2(0,2.54) 3(2.54,0) 4(2.54,2.54) 5(5.08,0) 6(5.08,2.54) 7(7.62,0) 8(7.62,2.54) 9(10.16,0) 10(10.16,2.54) 11(12.7,0) 12(12.7,2.54) 13(15.24,0) 14(15.24,2.54) 15(17.78,0) 16(17.78,2.54)
  silkscreen extent -1.27,-1.27 19.05,3.81
HDR2X10 [mm] "Connector; Header; 10x2 Position"
  rect 1.5x1.5 hole 0.9: 1(0,0)
  round 1.5 hole 0.9: 2(0,2.54) 3(2.54,0) 4(2.54,2.54) 5(5.08,0) 6(5.08,2.54) 7(7.62,0) 8(7.62,2.54) 9(10.16,0) 10(10.16,2.54) 11(12.7,0) 12(12.7,2.54) 13(15.24,0) 14(15.24,2.54) 15(17.78,0) 16(17.78,2.54) 17(20.32,0) 18(20.32,2.54) 19(22.86,0) 20(22.86,2.54)
  silkscreen extent -1.27,-1.27 24.13,3.81
HDR2X16 [mm] "Connector; Header; 16x2 Position"
  rect 1.5x1.5 hole 0.9: 1(0,0)
  round 1.5 hole 0.9: 2(0,2.54) 3(2.54,0) 4(2.54,2.54) 5(5.08,0) 6(5.08,2.54) 7(7.62,0) 8(7.62,2.54) 9(10.16,0) 10(10.16,2.54) 11(12.7,0) 12(12.7,2.54) 13(15.24,0) 14(15.24,2.54) 15(17.78,0) 16(17.78,2.54) 17(20.32,0) 18(20.32,2.54) 19(22.86,0) 20(22.86,2.54) 21(25.4,0) 22(25.4,2.54) 23(27.94,0) 24(27.94,2.54) 25(30.48,0) 26(30.48,2.54) 27(33.02,0) 28(33.02,2.54) 29(35.56,0) 30(35.56,2.54) 31(38.1,0) 32(38.1,2.54)
  silkscreen extent -1.27,-1.27 39.37,3.81
HDR2X19 [mm] "Connector; Header; 19x2 Position"
  rect 1.5x1.5 hole 0.9: 1(0,0)
  round 1.5 hole 0.9: 2(0,2.54) 3(2.54,0) 4(2.54,2.54) 5(5.08,0) 6(5.08,2.54) 7(7.62,0) 8(7.62,2.54) 9(10.16,0) 10(10.16,2.54) 11(12.7,0) 12(12.7,2.54) 13(15.24,0) 14(15.24,2.54) 15(17.78,0) 16(17.78,2.54) 17(20.32,0) 18(20.32,2.54) 19(22.86,0) 20(22.86,2.54) 21(25.4,0) 22(25.4,2.54) 23(27.94,0) 24(27.94,2.54) 25(30.48,0) 26(30.48,2.54) 27(33.02,0) 28(33.02,2.54) 29(35.56,0) 30(35.56,2.54) 31(38.1,0) 32(38.1,2.54) 33(40.64,0) 34(40.64,2.54) 35(43.18,0) 36(43.18,2.54) 37(45.72,0) 38(45.72,2.54)
  silkscreen extent -1.27,-1.27 46.99,3.81
LFOSC-32 [mm]
  rect 1.1x1.3 smd: 1(0,0) 2(0,-2.1) 3(1.9,-2.1) 4(1.9,0)
MICRO-USB [mm]
  rect 0.4x1.75 smd: 1(-1.3,0) 2(-0.65,0) 3(0,0) 4(0.65,0) 5(1.3,0)
  oval 0.7x1.2 hole 0.7 slot 1.2 at 90 deg unplated: ""(-2.725,-2.855) ""(2.725,-2.855)
  rect 2x1.4 hole 0.65 slot 1.05 at 90 deg unplated copper offset -0.475,0: ""(-2.425,0.175)
  rect 1.425x2.5 smd: ""(-0.962,-3.075) ""(0.962,-3.075)
  rect 2x1.4 hole 0.65 slot 1.05 at 90 deg unplated copper offset 0.475,0: ""(2.425,0.175)
  Top Layer region: 3.9,-1.475 3.375,-1.475 3.375,-3.925 2.075,-3.925 2.075,-0.775 3.9,-0.775
  Top Layer region: -3.9,-1.475 -3.375,-1.475 -3.375,-3.925 -2.075,-3.925 -2.075,-0.775 -3.9,-0.775
RESC0603(1608)_N [mm] "Chip Resistor, Body 1.6x0.8mm, IPC Medium Density"
  rect 0.9x1 smd: 1(-0.8,0) 2(0.8,0)
  silkscreen extent -0.05,-0.4 0.05,0.4, body extent -0.85,-0.47 0.85,0.47, height 0.6
RJ-8_N [mm] "SOP, 8-Leads, Body 2.9x1.6mm, Pitch 0.65mm, IPC Medium Density"
  oval 1.6x0.45 smd: 1(-1.15,0.975) 2(-1.15,0.325) 3(-1.15,-0.325) 4(-1.15,-0.975) 5(1.15,-0.975) 6(1.15,-0.325) 7(1.15,0.325) 8(1.15,0.975)
  silkscreen extent -1.28,-1.5 0.25,1.87, body extent -0.85,-1.5 0.85,1.5, height 1.45
SOIC-16-FLASH [mm] "SOIC, 16-Leads, Body 10.30x7.50mm, Pitch 1.27mm, IPC Medium Density"
  rect 1.85x0.6 smd: 1(-4.675,4.445) 2(-4.675,3.175) 3(-4.675,1.905) 4(-4.675,0.635) 5(-4.675,-0.635) 6(-4.675,-1.905) 7(-4.675,-3.175) 8(-4.675,-4.445) 9(4.675,-4.445) 10(4.675,-3.175) 11(4.675,-1.905) 12(4.675,-0.635) 13(4.675,0.635) 14(4.675,1.905) 15(4.675,3.175) 16(4.675,4.445)
  silkscreen extent -4.8,-5.15 3.35,5.42, body extent -3.75,-5.15 3.75,5.15, height 2.65
TSOP-44-SRAM [mm] "TSOP, 44-Leads, Body 18.41x10.16mm, Pitch 0.80mm, IPC Medium Density"
  rect 1.2x0.55 smd: 1(-5.75,8.4) 2(-5.75,7.6) 3(-5.75,6.8) 4(-5.75,6) 5(-5.75,5.2) 6(-5.75,4.4) 7(-5.75,3.6) 8(-5.75,2.8) 9(-5.75,2) 10(-5.75,1.2) 11(-5.75,0.4) 12(-5.75,-0.4) 13(-5.75,-1.2) 14(-5.75,-2) 15(-5.75,-2.8) 16(-5.75,-3.6) 17(-5.75,-4.4) 18(-5.75,-5.2) 19(-5.75,-6) 20(-5.75,-6.8) 21(-5.75,-7.6) 22(-5.75,-8.4) 23(5.75,-8.4) 24(5.75,-7.6) 25(5.75,-6.8) 26(5.75,-6) 27(5.75,-5.2) 28(5.75,-4.4) 29(5.75,-3.6) 30(5.75,-2.8) 31(5.75,-2) 32(5.75,-1.2) 33(5.75,-0.4) 34(5.75,0.4) 35(5.75,1.2) 36(5.75,2) 37(5.75,2.8) 38(5.75,3.6) 39(5.75,4.4) 40(5.75,5.2) 41(5.75,6) 42(5.75,6.8) 43(5.75,7.6) 44(5.75,8.4)
  silkscreen extent -5.87,-9.25 4.75,9.35, body extent -5.15,-9.25 5.15,9.25, height 1.2
VREG-1.2 [mm] "SOT23, 5-Leads, Body 2.90x2.80mm, Pitch 0.95mm, IPC Medium Density"
  rect 1x0.6 smd: 1(-1.35,0.95) 2(-1.35,0) 3(-1.35,-0.95) 4(1.35,-0.95) 5(1.35,0.95)
  silkscreen extent -1.47,-1.5 0.45,1.92, body extent -0.85,-1.5 0.85,1.5, height 1
VREG-3.3 [mm] "SOT223, 4-Leads, Body 6.50x7.00mm (avg), Pitch 2.30mm, IPC Medium Density"
  rect 1.75x1 smd: 1(-3.125,2.3) 2(-3.125,0) 3(-3.125,-2.3)
  rect 1.75x3.25 smd: 4(3.125,0)
  silkscreen extent -3.25,-3.35 1.95,3.47, body extent -1.85,-3.35 1.85,3.35, height 1.8
VREG-5 [mm] "SOT23, 5-Leads, Body 2.90x2.80mm, Pitch 0.95mm, IPC Medium Density"
  rect 1x0.6 smd: 1(-1.375,0.95) 2(-1.375,0) 3(-1.375,-0.95) 4(1.375,-0.95) 5(1.375,0.95)
  silkscreen extent -1.5,-1.55 0.5,1.92, body extent -0.88,-1.52 0.87,1.53, height 1.45

## Part data
"ARM 20": library part "Header 10X2", "Header, 10-Pin, Dual row"
BNCX BNCY: "BNC Elbow Connector"
C1 C3 C4 C5 C7 C8 C9 C10 C11 C13 C14 C15 C17 C18 C19 C21 C22 C23 C25 C26 C27 C28 C29 C30 C31 C32 C33 C34 C35 C36 C37 C38 C39 C40 C41 C42 C43 C44 C45 C46 C47 C49 C54 C55 C56 C57 C58 C59 C60 C61 C62: library part CMP-1035-00001-1, "CAP 0.5pF 10V ±0.1pF 0603 (1608 Metric) Thickness 1mm SMD"
C2 C6 C12 C16 C20 C24: library part CMP-1036-00001-1, "CAP 0.5pF 10V ±0.1pF 0805 (2012 Metric) Thickness 0.75mm SMD"
C48: library part "Cap Pol3", "Polarized Capacitor (Surface Mount)"
D1: "1 Amp General Purpose Rectifier"
D4 D5: "Typical RED, GREEN, YELLOW, AMBER GaAs LED"
DACX DACY: "Single 16-Bit Voltage Output nanoDAC with SPI Interface, 2.7 to 5.5 V, -40 to +85 degC, RJ-8, Pb-Free, Reel"
EFM32: "EFM32 Giant Gecko, M3 ARM Cortex CPU, 1024 KB Flash, 128 KB RAM, 1.85 - 3.8 V Supply, 48 MHz Max Speed, -40 to 85 degC, 112-Pin BGA, RoHS Compliant"
FPGA: "Spartan-6 LX 1.2V FPGA, 218 User I/Os, 324-Ball Chip-Scale BGA (0.8mm Pitch), Speed Grade 2, Industrial Grade, Pb-Free"
H1 H4: library part "Header 19X2", "Header, 19-Pin, Dual row"
H2 H5: library part "Header 16X2", "Header, 16-Pin, Dual row"
H3 H6: library part "Header 3X2", "Header, 3-Pin, Dual row"
H10 H15: library part "Header 4X2", "Header, 4-Pin, Dual row"
H11: library part "Header 8X2", "Header, 8-Pin, Dual row"
H12 H14 H20 H21: library part "Header 2", "Header, 2-Pin"
H13: library part "Header 2X2", "Header, 2-Pin, Dual row"
H16 H17 H18 H23: library part "Header 3", "Header, 3-Pin"
H19: library part "Header 6X2", "Header, 6-Pin, Dual row"
H24 H25: "Header, 2-Pin, Dual row"
H26 H27 H28 H29: "Header, 2-Pin"
H30: "Header, 3-Pin"
JTAG: "Header, 5-Pin, Dual row"
R1 R2 R3: library part CMP-1012-00001-1, "Jumper 0603 (1608 Metric)"
RES_FPGA RESET_BTN ZOOM_IN ZOOM_OUT: library part switch-button
VREF: "Precision Micropower, Low Dropout Voltage Reference, 5 V Output, 5.1 to 15 V Supply, Industrial, 8-pin SOIC (R-8), Reel"

## Via types
v1: diameter 10, hole 6, Top Layer to Bottom Layer, 277 vias
v2: diameter 16, hole 8, Top Layer to Bottom Layer, 252 vias
v3: diameter 10/10/10/10/10/10 (per signal layer), hole 6, Top Layer to Bottom Layer, 2 vias

## Nets (pads, with @x,y where several pads share a name; then routed paths per layer and width w, separated by ;. In a path a pad name is that pad's centre, name@x,y a point inside that pad or via, vN(x,y) a via of type N, cw(c..) or ccw(c..) an arc to the next point about the centre after c; other vN are vias at no path point)
1.2V: C1.2 C2.2 C3.2 C4.2 C43.2 FPGA.G7 FPGA.H9 FPGA.H11 FPGA.J8 FPGA.J10 FPGA.K9 FPGA.K11 FPGA.L8 FPGA.L10 FPGA.M7 FPGA.M12 VR12.5 | length 3681.3
  Top Layer w4: FPGA.M7@2966.26,1876.26 2966,1876.26 2997.5,1907.76 FPGA.L8@2997.76,1907.76 3007,1917 3007,1961.5 FPGA.J8@2997.76,1970.75 3007,1979.99 ; FPGA.K9@3029.25,1939.25 3039,1949 3038.5,1993 ; FPGA.L10@3060.75,1907.76 3060,1907.76 FPGA.K11@3091.5,1939.25 ; v2(3078,2298) 3089.04,2298 3092.52,2294.52 3046.4,2248.4 3046.4,2223.21 2992.2,2169 2929.43,2169 2925,2164.57 2925,2124 2944,2105 2944,2056 FPGA.G7@2966.26,2033.74 2981.52,2049 2998,2049 3007,2040 3007,1979.99 ; FPGA.H11@3092.24,2002.24 3083,1993 ; FPGA.M12@3123.74,1876.26 3130.49,1869.51 3130.49,1875.51 3114,1892 3114,1917.5 FPGA.K11@3092.24,1939.25 FPGA.K11@3091.5,1939.25 ; v2(4242,3535) VR12.5@4427.6,3535 ; v2(4427.6,3510) VR12.5@4427.6,3535 ; VR12.5@4427.6,3543.15 VR12.5@4427.6,3535 ; 3007,1979.99 3008.14,1981.13 3008.14,2001.86 3008.52,2002.24 FPGA.H9@3029.25,2002.24 3038.5,1993 ; 3038.5,1993 3083,1993 ; 3083,1993 3060.75,1971.5 FPGA.J10@3060.75,1970.75 3060.75,1970 FPGA.K11@3091.5,1939.25
  Bottom Layer w4: C4.2@3040,2349.57 C3.2@3145,2349.57 ; v2(3078,2298) 3093.43,2298 C3.2@3145,2349.57 ; C1.2@3335,2359.57 3292.06,2359.57 3281,2348.5 ; v2(4242,3535) 4242,3318 3716,2792 3465,2792 3455,2782 3455,2373.5 3430,2348.5 3281,2348.5 ; v2(4427.6,3510) 4520.43,3510 C43.2@4615,3415.43 ; C3.2@3145,2349.57 3191,2349.57 3192.06,2348.5 C2.2@3240,2348.5 3281,2348.5
3.3V: "ARM 20.1" "EFM HFOSC.4" "EFM LFOSC.4" "FPGA OSC.4" C5.2 C6.2 C7.2 C8.2 C9.2 C10.2 C11.2 C12.2 C13.2 C14.2 C15.2 C16.2 C17.2 C18.2 C19.2 C20.2 C21.2 C22.2 C23.2 C24.2 C25.2 C26.2 C27.2 C28.2 C29.2 C30.2 C31.2 C32.1 C33.1 C34.1 C35.1 C36.1 C41.2 C46.2 C47.2 C54.2 C56.2 C58.2 EFM32.D5 EFM32.D7 EFM32.F8 EFM32.G4 EFM32.G8 EFM32.H7 EFM32.K8 EFM32.K9 EFM32.L4 EFM32.L10 FB.11 FB.33 FLASH1.2 FPGA.B1 FPGA.B5 FPGA.B10 FPGA.B15 FPGA.B17 FPGA.D7 FPGA.D13 FPGA.E2 FPGA.E5 FPGA.E9 FPGA.E10 FPGA.E14 FPGA.E17 FPGA.G4 FPGA.G10 FPGA.G15 FPGA.J2 FPGA.J5 FPGA.J12 FPGA.J14 FPGA.J17 FPGA.K7 FPGA.M4 FPGA.M9 FPGA.M15 FPGA.P5 FPGA.P9 FPGA.P10 FPGA.P14 FPGA.R2 FPGA.R6 FPGA.R12 FPGA.R17 FPGA.U4 FPGA.U9 FPGA.U14 H20.1 H21.2 R1.2 R3.2 SRAM1.11 SRAM1.33 VR33.2 VREF.2 ZOOM_IN.1 ZOOM_IN.3 ZOOM_OUT.1 ZOOM_OUT.3 | length 25320.4
  Top Layer w4: H21.2@415,170 436,191 ; v2(415,2395.43) VREF.2@415,2244.49 415,2123 436,2102 436,191 ; ZOOM_IN.1@791.73,50 ZOOM_IN.3@791.73,227.17 ; ZOOM_OUT.1@1506.73,55 ZOOM_OUT.3@1506.73,232.17 ; FB.11@1738.62,1985.75 1949,1985.75 1980.5,1954.25 2160.24,1954.25 ; H20.1@2080,185 1553.9,185 ZOOM_OUT.3@1506.73,232.17 ; v2(2149.5,1996) 2149.5,1965 2160.24,1954.25 ; FB.33@2191.38,1954.25 2160.24,1954.25 ; v2(2716,2043) 2727,2032 2765.44,2032 2793,2004.44 v2(2793,1996) 2793,1986.53 FPGA.J2@2808.78,1970.75 ; v2(2751,2234) 2751,2217.5 FPGA.B1@2777.28,2191.22 2787,2181.5 2787,2118.51 FPGA.E2@2808.78,2096.73 2824.05,2112 v2(2887.52,2112.48) FPGA.E5@2903.27,2096.73 2913,2106.46 2913,2181.49 FPGA.B5@2903.27,2191.22 ; v2(2797.01,1766) 2797.01,1770 FPGA.R2@2808.78,1781.77 2824.53,1766.02 2840.02,1766.02 2865,1791 2881,1791 FPGA.P5@2903.27,1813.27 ; v2(2856,1703) FPGA.U4@2871.77,1718.78 ; v2(2856,2066) 2856,2049.51 FPGA.G4@2871.77,2033.74 2888,2017.51 v2@2888,1986.02 ; v2(2887.52,1986.5) v2@2888,1986.02 ; FPGA.R6@2934.76,1781.77 2934.5,1781.77 2934.5,1804 ; v2(2950.51,2143.98) FPGA.D7@2966.26,2128.23 2982.5,2111.98 3014,2111.98 FPGA.E9@3029.25,2096.73 FPGA.E10@3060.75,2096.73 ; FPGA.K7@2966.26,1939.25 2949.5,1956.01 2918.01,1956.01 FPGA.J5@2903.27,1970.75 ; v2(3012.99,1671.06) 3012.99,1702.52 FPGA.U9@3029.25,1718.78 3039,1728.53 3039,1803.52 FPGA.P9@3029.25,1813.27 ; FPGA.M9@3029.25,1876.26 3039,1866.51 3039,1823.02 FPGA.P9@3029.25,1813.27 ; FPGA.B10@3060.75,2191.22 3051,2181.47 3051,2106.48 FPGA.E10@3060.75,2096.73 ; FPGA.D13@3155.24,2128.23 FPGA.D13@3155.12,2128.11 ; v2(3165.55,1766.51) 3139,1766.51 FPGA.R12@3123.74,1781.77 3107.51,1798 3076.02,1798 FPGA.P10@3060.75,1813.27 FPGA.P9@3029.25,1813.27 ; FPGA.U14@3186.73,1718.78 3177,1728.51 3177,1803.54 FPGA.P14@3186.73,1813.27 v2(3202,1798) 3264.99,1798 FPGA.R17@3281.22,1781.77 ; FPGA.M15@3218.23,1876.26 v2(3234,1860.49) ; FPGA.G15@3218.23,2033.74 3218.23,2018.23 3201,2001 3201,1983 3195,1977 3192.98,1977 FPGA.J14@3186.73,1970.75 ; FPGA.B15@3218.23,2191.22 3228.01,2201 3271.44,2201 FPGA.B17@3281.22,2191.22 3272,2182 3272,2097.48 3280.47,2097.48 FPGA.E17@3281.22,2096.73 3271.49,2087 3196.46,2087 FPGA.E14@3186.73,2096.73 3186.5,2096.73 FPGA.D13@3155.12,2128.11 ; VR33.2@3570,3401.97 v2(3570,3355) 3570,3145 3584.48,3130.52 3797.42,3130.52 ; v2(3670,2070) 3658,2058 3384,2058 3362,2059 3348,2045 3348,2035 3337,2024 3310,2024 3304,2018 3304,2005.78 3281.22,1983 FPGA.J17@3281.22,1970.75 3271.47,1961 3196.48,1961 FPGA.J14@3186.73,1970.75 ; v2(3732,1966) 3769.75,1966 3770,1965.75 SRAM1.11@3798.62,1965.75 4009,1965.75 4040.5,1934.25 SRAM1.33@4251.38,1934.25 4282.75,1934.25 ; v2(3744.83,3068) 3785,3068 3797.42,3080.42 3797.42,3130.52 ; v2(4335,1889) 4328,1889 4282.75,1934.25 ; v1(4405,1962) 4424,1962 4436,1950 4436,1945 4425.25,1934.25 4405,1934.25 ; FLASH1.2@4410.94,915 v2(4638,915) v2(4729,915) ; v1(4422,2090) 4436,2104 4436,2197 4373,2260 4373,3071.52 4417,3115.52 ; v2(4557.42,3055) 4557.42,3115.52 4417,3115.52 ; EFM32.G4@4782.01,1873.5 4793,1862.51 ; EFM32.D5@4813.5,1967.99 4824.51,1979 4865.49,1979 EFM32.D7@4876.5,1967.99 4892,1952.49 4892,1920.99 EFM32.F8@4907.99,1905 EFM32.G8@4907.99,1873.5 4907.5,1873.5 EFM32.H7@4876.25,1842.26 ; EFM32.K8@4907.99,1779.02 EFM32.K9@4939.49,1779.02 ; v2(5079,3054.97) 5172.42,3054.97 ; v2(5155,1705) 5145,1715 5003.5,1715 EFM32.L10@4970.98,1747.52 4970.5,1747.52 4951,1767.02 ; 436,191 472.17,227.17 ZOOM_IN.3@791.73,227.17 ; ZOOM_IN.3@791.73,227.17 952.83,227.17 988,192 1307.83,192 1348,232.17 ZOOM_OUT.3@1506.73,232.17 ; v2@2888,1986.02 FPGA.J5@2903.27,1970.75 ; FPGA.P5@2903.27,1813.27 2912.54,1804 2934.5,1804 ; FPGA.P5@2903.27,1813.27 2903.27,1831.73 2871.77,1863.23 FPGA.M4@2871.77,1876.26 2882,1886.49 2882,1949.48 FPGA.J5@2903.27,1970.75 ; 2934.5,1804 3019.98,1804 FPGA.P9@3029.25,1813.27 ; FPGA.E10@3060.75,2096.73 3051,2086.98 3051,2043.49 FPGA.G10@3060.75,2033.74 3074.26,2033.74 3123.74,1984.26 FPGA.J12@3123.74,1970.75 3133.49,1961 3167,1961 3176.75,1970.75 FPGA.J14@3186.73,1970.75 ; FPGA.E10@3060.75,2096.73 3076.48,2081 3129,2081 3143,2095 3143,2115.99 FPGA.D13@3155.12,2128.11 ; 3797.42,3130.52 3836.52,3130.52 3924,3218 4100,3218 4202.48,3115.52 4417,3115.52 ; 4282.75,1934.25 4405,1934.25 ; 4405,1934.25 4445,1894.25 4445,1592 4455,1582 4616.49,1582 EFM32.L4@4782.01,1747.52 4793,1758.51 4793,1862.51 ; 4793,1862.51 4801.51,1854 4864.5,1854 EFM32.H7@4876.25,1842.26 ; EFM32.H7@4876.25,1842.26 EFM32.H7@4876.5,1842.01 4865,1830.51 4865,1729 4875,1719 4935,1719 4951,1735 4951,1767.02 ; EFM32.K9@4939.49,1779.02 4951,1767.5 4951,1767.02 ; EFM32.K9@4939.49,1779.02 4939.49,1778.53 4951,1767.02
  Signal Layer 1 w4: H20.1@2080,185 2120,225 2876,225 v2(2933.5,167.5) ; v2(2149.5,1996) v2(2793,1996) ; v2(2716,2043) 2716,2034 2718,2032 2842.02,2032 v2(2887.52,1986.5)
  Signal Layer 2 w4: v2(2751,2234) 2751,2292 v2(2754,2295) ; v2(3670,2070) 3732,2008 v2(3732,1966)
  Signal Layer 3 w4: v2(2887.52,2112.48) 2919.02,2143.98 v2(2950.51,2143.98) ; v2(3165.55,1766.51) 3170.51,1766.51 v2(3202,1798)
  Signal Layer 4 w4: v2(2797.01,1766) 2797.01,1761.99 v2(2856,1703) ; v2(4729,915) 4740,915 5233,422 5828,422 5860,390
  Bottom Layer w4: v2(415,2395.43) C46.2@675,2395.43 646,2366.43 646,2134.43 C47.2@670,2110.43 ; R1.2@2436.5,1490 2436.5,1635 2446.5,1645 2595.43,1645 C14.2@2650.43,1700 C13.2@2650.43,1790 2650.43,1836 2651.5,1837.06 C12.2@2651.5,1885 2651.5,1930 2655.43,1933.94 C11.2@2655.43,1980 C10.2@2655.43,2070 2597.43,2128 2590,2128 2584.57,2133.43 C9.2@2584.57,2160 C8.2@2584.57,2255 2664.13,2334.57 C7.2@2755,2334.57 ; C15.2@2745,1570.43 2791,1570.43 2792.06,1571.5 C16.2@2840,1571.5 2884,1571.5 2885.06,1570.43 C17.2@2930,1570.43 C18.2@3014,1570.43 ; v2(2754,2295) 2754,2333.57 C7.2@2755,2334.57 ; v2(2856,2066) 2856,2080.96 v2(2887.52,2112.48) ; v2(2933.5,167.5) 2965,167.5 2976.5,178.99 R3.2@2976.5,200 2976.5,222.5 3172,418 3172,1325 3255,1408 3255,1505.43 C21.2@3320,1570.43 ; C5.2@2940,2344.57 2883.07,2401.5 C6.2@2845,2401.5 2802.5,2401.5 2786,2385 2786,2365.57 C7.2@2755,2334.57 ; v2(3012.99,1671.06) 3012.99,1581.28 3014.96,1579.32 3010.04,1574.39 C18.2@3014,1570.43 ; v2(3202,1798) 3234,1830 v2(3234,1860.49) ; C25.2@3429.57,1940 3429.57,1895.06 3428.5,1894 C24.2@3428.5,1850 3428.5,1802.06 3429.57,1801 C23.2@3429.57,1755 C22.2@3429.57,1660 3429.57,1585 3415,1570.43 C21.2@3320,1570.43 ; v2(3570,3355) 3645.43,3430.43 C41.2@3765,3430.43 ; C58.2@3672.42,2995.6 v2(3744.83,3068) ; v2(4335,1889) 4488.57,1889 C28.2@4489.57,1890 ; v1(4405,1962) 4405,1994 4433,2022 4433,2079 v1(4422,2090) ; C26.2@4489.57,2080 C27.2@4489.57,1985 C28.2@4489.57,1890 ; C30.2@4494.57,1700 4494.57,1745 4489.57,1750 C29.2@4489.57,1795 C28.2@4489.57,1890 ; v2(4557.42,3055) 4858.02,3055 C56.2@4892.42,3020.6 4973.29,2939.73 C54.2@5022.42,2939.73 5079,2996.31 v2(5079,3054.97) ; v2(4638,915) 5055,1332 C35.1@5055,1564.57 ; C31.2@4670,1564.57 4717,1564.57 4722,1569.57 C32.1@4770,1569.57 C33.1@4870,1569.57 C34.1@4960,1569.57 5005,1569.57 5010,1564.57 C35.1@5055,1564.57 ; v2(5155,1705) 5170.43,1705 C36.1@5195.43,1730 5195.43,1705 C35.1@5055,1564.57 ; C18.2@3014,1570.43 C18.2@3030,1570.43 C19.2@3135,1570.43 3176,1570.43 3182.06,1576.5 C20.2@3225,1576.5 3269,1576.5 3275.06,1570.43 C21.2@3320,1570.43
5V: H16.1 PSU.1 | length 1579.1
  Top Layer w4: PSU.1@4062.99,3762.2 v2(4063,3820)
  Signal Layer 1 w4: v2(4063,3820) 4321,3820 4341,3840 5470,3840 H16.1@5545,3765
A5V: C44.1 C45.1 C62.2 DACX.2 DACY.2 R2.2 VREG5.5 | length 7533.7
  Top Layer w4: v2(177,2905) 177,2835 180,2832 185,2832 190,2827 190,2699.7 192.5,2697.2 DACX.2@225.28,2697.2 ; v2(844,2710) 856,2698 856,2697.2 DACY.2@890.28,2697.2 ; v2(856,2789) 856,2805 866,2815 900,2815 910,2825 v2(910,2871) ; v2(1592,3076) 1997,3076 2027.6,3045.4 VREG5.5@2027.6,2954.13
  Bottom Layer w4: v2(177,2905) 274,2808 274,2745 ; C44.1@180,2374.57 274,2468.57 274,2745 ; v2(321,2756) 285,2756 274,2745 ; v2(615,2849) 654,2849 909,2594 909,2383.57 C45.1@885,2359.57 ; v2(844,2710) 844,2722 856,2734 v2(856,2789) ; v2(968,2873) 968,2110 477,1619 477,967 1038,406 2385,406 2585,206 2585,171 2603.69,152.31 2621.5,152.31 R2.2@2621.5,185 ; v2(1584,3192) 1622,3230 2025.43,3230 C62.2@2080,3175.43
AGND: BNCX.1 BNCY.1 C60.1 C61.1 C62.1 D1.1 D4.2 DACX.5 DACY.5 H24.1 H25.1 H29.2 VREG5.2 | length 9647.2
  Top Layer w4: DACX.5@134.72,2748.39 169.22,2748.39 177,2756.17 v2(177,2796) ; H24.1@220,3050 v2(157,3050) 7,2900 7,317 320,4 2536,4 2559.16,27.16 2838.78,27.16 D4.2@2838.78,69.69 ; BNCX.1@540,3455 601,3455 v2(602,3454) ; DACY.5@799.72,2748.39 v2(844.22,2748.39) ; v2(920,3155) H25.1@985,3155 ; BNCY.1@1245,3455 1300,3455 v2(1301,3454) ; D1.1@1454.09,3175 v2(1527,3175) ; v2(1576,3058) 1745,2889 2055,2889 2065,2879 VREG5.2@2065,2845.87
  Signal Layer 3 w4: v2(2374,2894) 3143,2894 3251,2786 v2(3251,2548)
  Signal Layer 4 w4: v2(3251,2548) 3303,2548 3590,2261 H29.2@3590,2190
  Bottom Layer w4: v2(1576,3058) 1766.57,3058 C60.1@1920,2904.57 1944,2928.57 1944,2968.57 C62.1@2080,3104.57 2080,3019.57 C61.1@2205,2894.57 ; C61.1@2205.57,2894 v2(2374,2894)
CLK: DACX.8 DACY.8 H15.6 | length 1642.7
  Top Layer w4: DACX.8@134.72,2671.61 174,2671.61 185.61,2660 507,2660 518.61,2671.61 DACY.8@799.72,2671.61 800,2671.61 800,2045 815,2030 H15.6@1135,2030
DATA_X: DACX.1 H15.2 | length 1278.2
  Top Layer w4: DACX.1@225.28,2671.61 v2(327.39,2671.61)
  Signal Layer 4 w4: v2(327.39,2671.61) 1135,1864 H15.2@1135,1830
DATA_Y: DACY.1 H15.4 | length 869.2
  Top Layer w4: DACY.1@890.28,2671.61 v2(935,2671.61)
  Signal Layer 2 w4: v2(935,2671.61) 935,2130 H15.4@1135,1930
EBI.A0: EFM32.J4 FPGA.F15 H4.1 | length 4119.1
  Top Layer w4: FPGA.F15@3218.23,2065.24 3230,2065.24 3238,2073.24 v1@3238,2079 ; v1(4766,1782) 4782.01,1798.01 EFM32.J4@4782.01,1810.51 v1(4766,1794.5)
  Signal Layer 1 w4: v1(3329,1732) 3336,1725 3337,1726 v1(3517,1726) 3524,1733 3687,1733 3688,1732 3702,1732 ; v1(4766,1782) 4753.5,1782 ; v1(4766,1794.5) 4753.5,1782 ; 3702,1732 3738,1696 3756,1696 ; 3702,1732 3720,1732 3756,1696 ; 3756,1696 4609,1696 ; 4609,1696 4695,1782 4753.5,1782 ; 4609,1696 4616,1696 4694,1774 4745.5,1774 4753.5,1782
  Signal Layer 2 w4: v1@3238,2079 3242.5,2074.5 3242.5,2067.46 3313,1996.96 3313,1934 3517,1730 v1(3517,1726)
  Signal Layer 4 w4: H4.1@1895.08,2623.03 2489.11,2029 2929,2029 3149,1809 3252,1809 v1(3329,1732)
  other v1: 3240,2079
EBI.A1: EFM32.K3 FPGA.F16 H4.3 | length 3488.5
  Top Layer w4: v1(3240,2046) 3240,2055.51 FPGA.F16@3249.72,2065.24 3249.72,2074.72 3250.2,2075.2 v1(3263.8,2075.2) ; v1(4735,1763) 4735,1763.5 EFM32.K3@4750.51,1779.02
  Signal Layer 1 w4: v1(2360.11,2258) 3266,2258 3279,2245 3279,2224 3250,2195 3250,2089 v1(3263.8,2075.2) ; v1(3540,1656) 3720,1656 3729.79,1665.79 4637.79,1665.79 v1(4735,1763)
  Signal Layer 2 w4: v1(3240,2046) 3240,2042 3223,2025 3223,1933.17 3235,1921.17 3257.83,1921.17 3523,1656 v1(3540,1656)
  Signal Layer 4 w4: H4.3@1995.08,2623.03 v1(2360.11,2258)